# EAGLE board Teensy_3_1_XBee Adapter_Panel_v10 (EAGLE 7.2.0), part 1 of 2
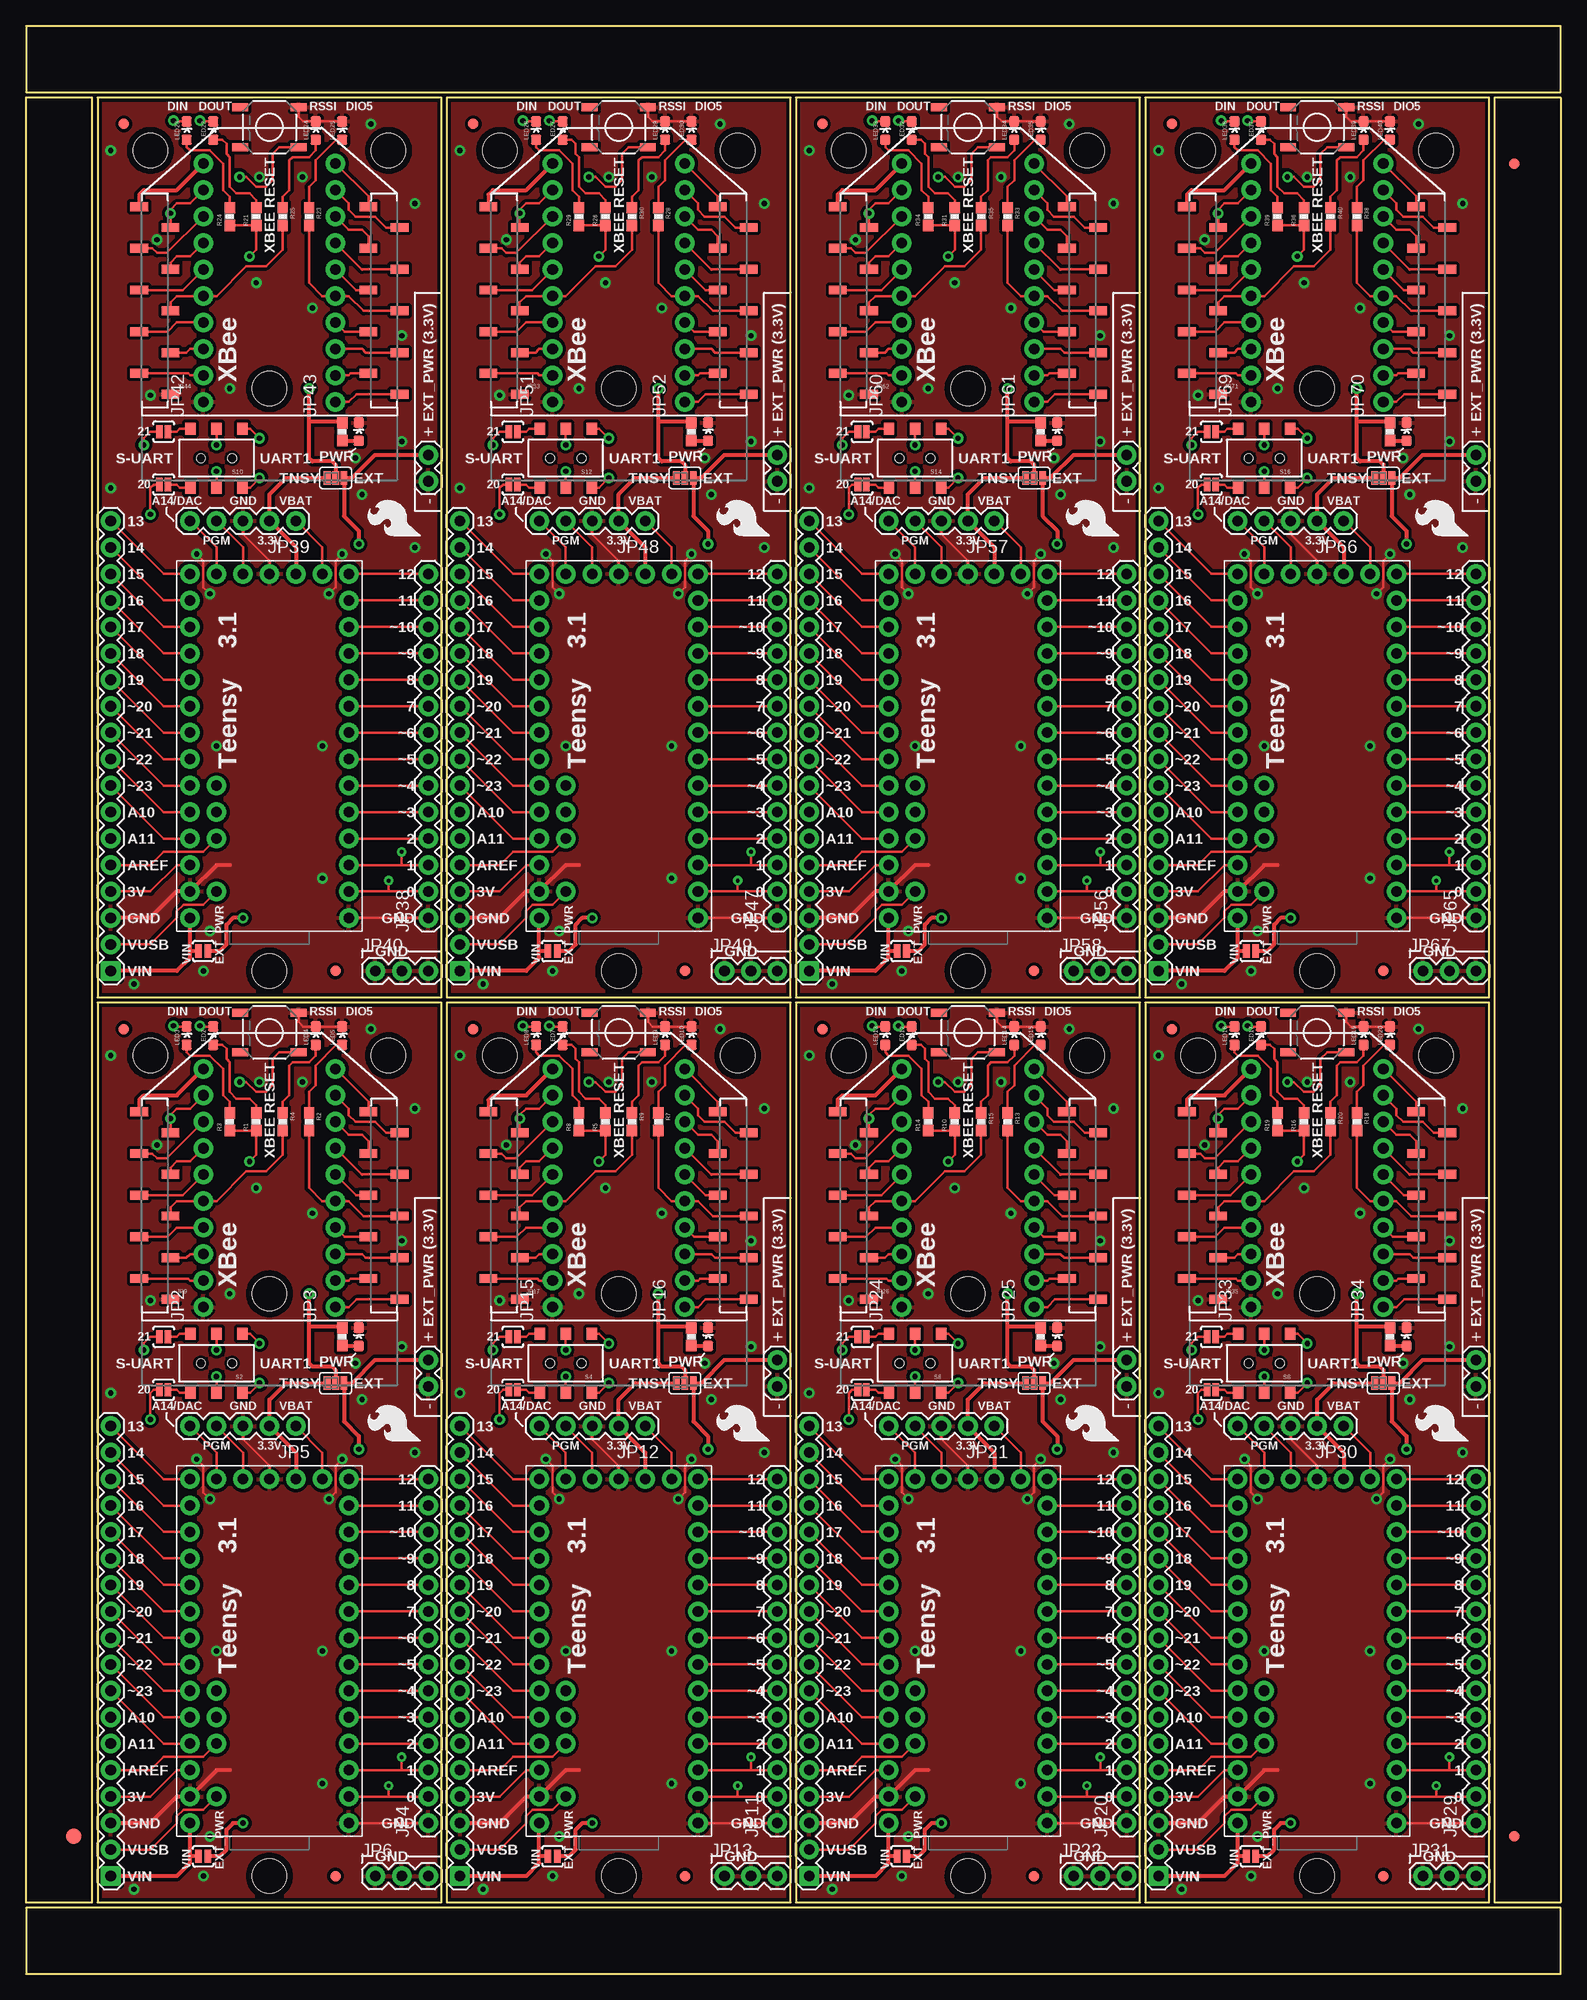
[diagram p0: board, top side]
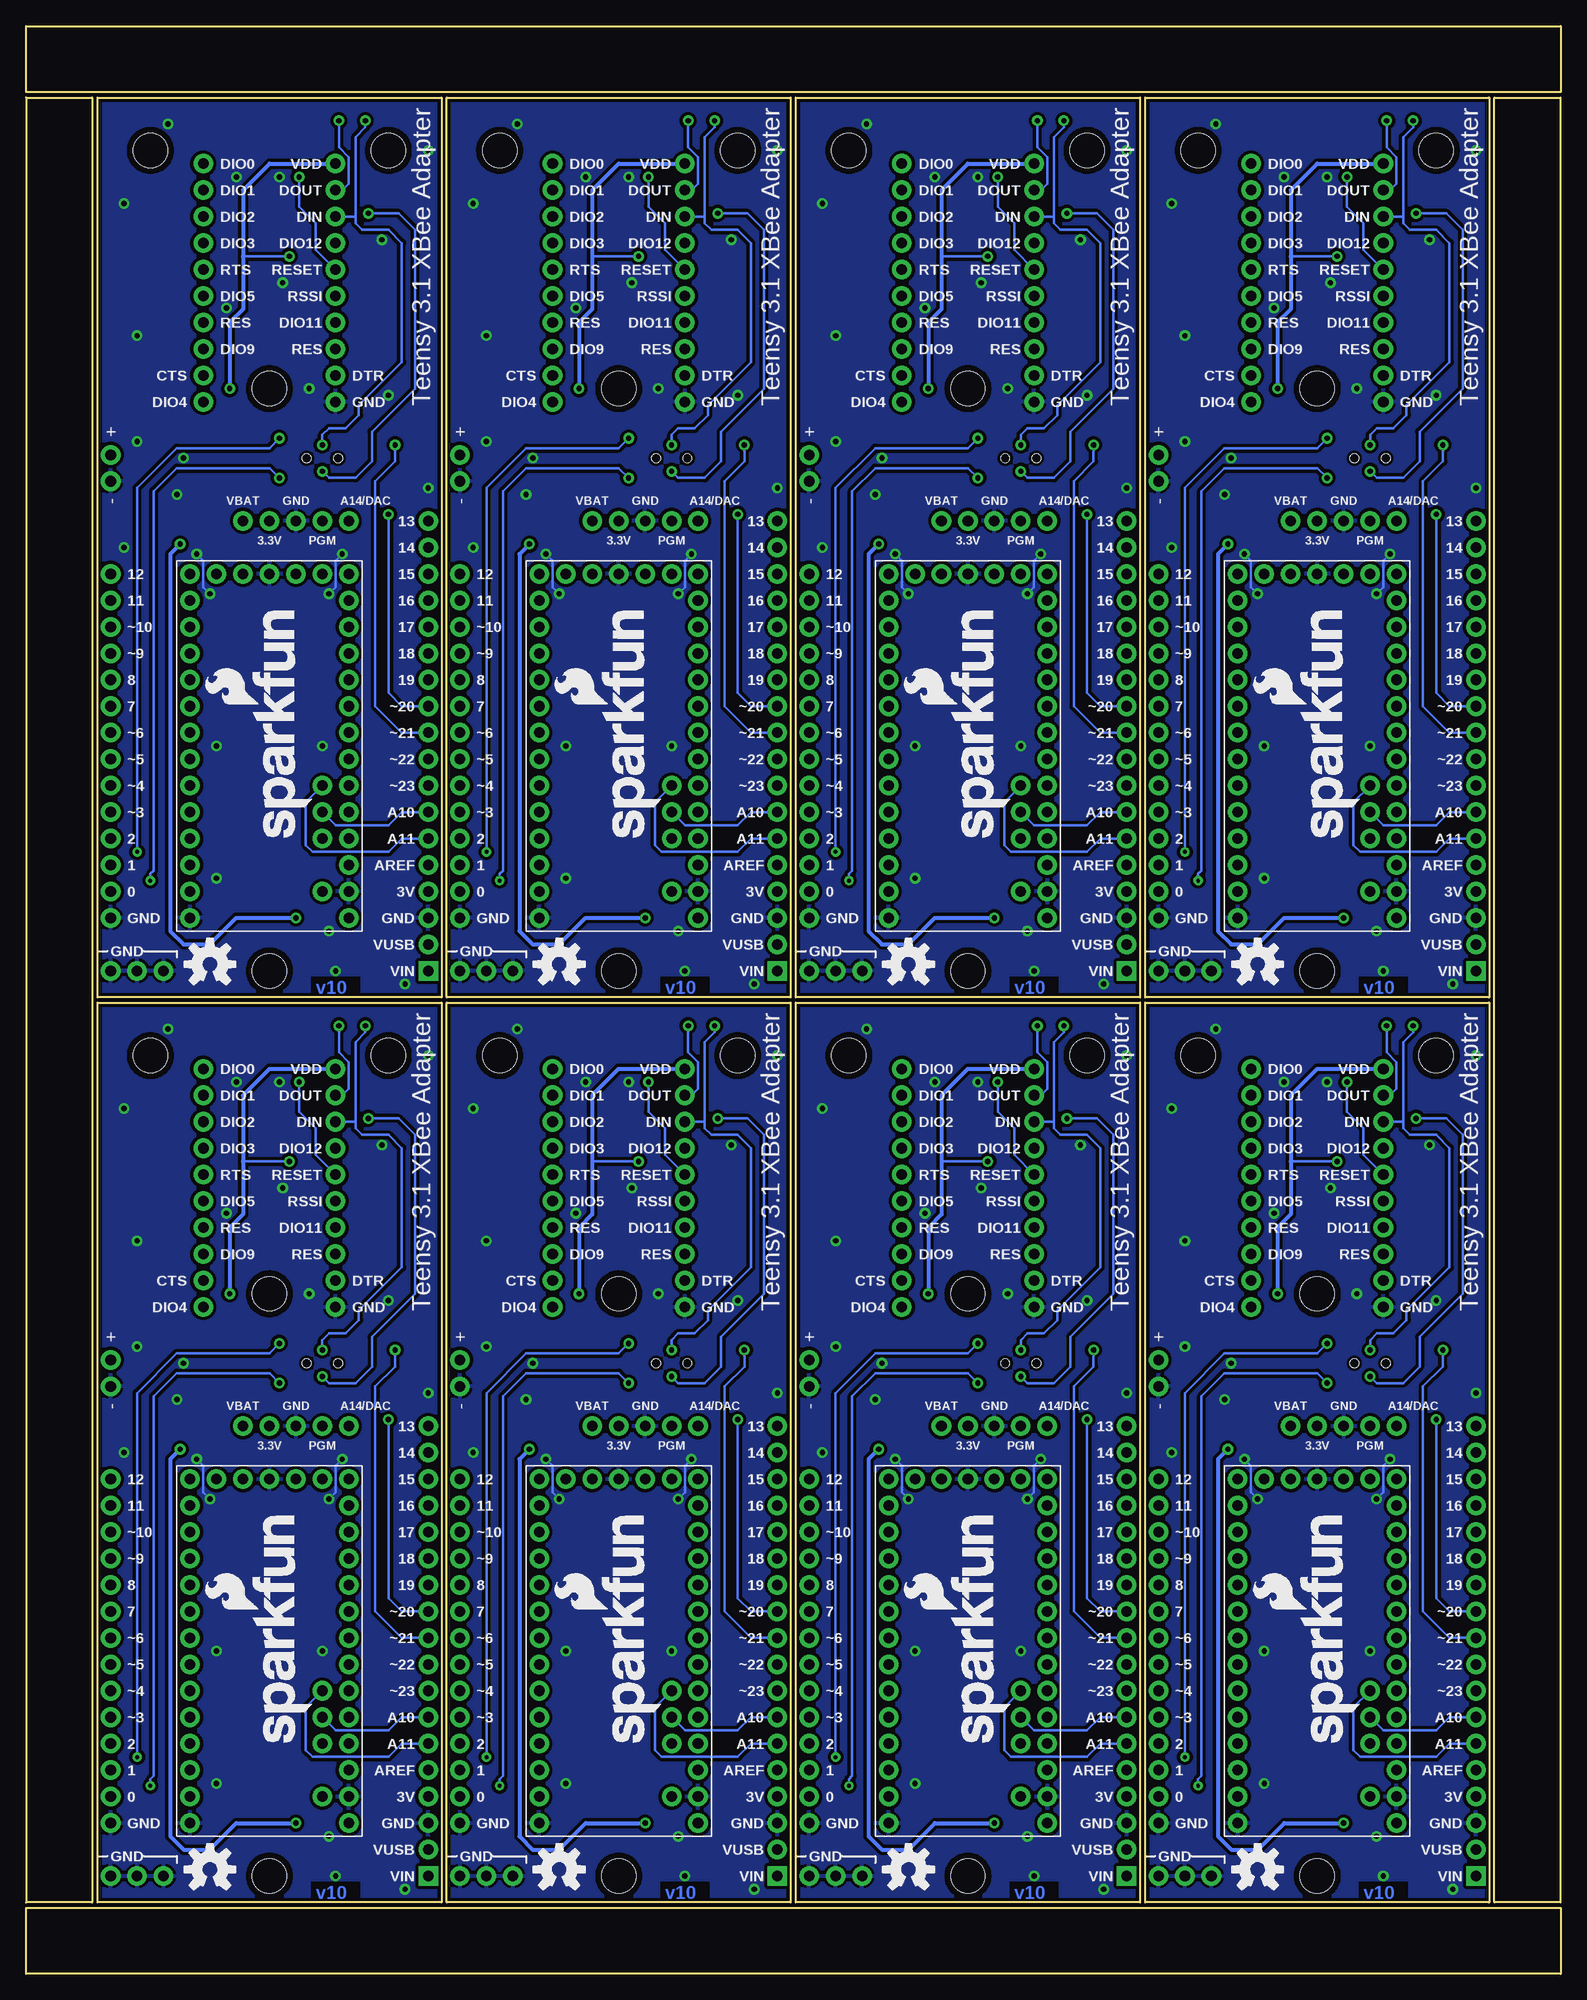
[diagram p1: board, bottom side, seen from below]

Size 147.32 x 186.94 mm. Coordinates in mm from the lower left corner, seen from the top.
Outline: 6.86,6.86 39.88,6.86 39.88,93.22 6.86,93.22 6.86,6.86
Outline: 40.39,6.86 73.41,6.86 73.41,93.22 40.39,93.22 40.39,6.86
Outline: 73.91,6.86 106.93,6.86 106.93,93.22 73.91,93.22 73.91,6.86
Outline: 107.44,6.86 140.46,6.86 140.46,93.22 107.44,93.22 107.44,6.86
Outline: 6.86,93.73 39.88,93.73 39.88,180.09 6.86,180.09 6.86,93.73
Outline: 40.39,93.73 73.41,93.73 73.41,180.09 40.39,180.09 40.39,93.73
Outline: 73.91,93.73 106.93,93.73 106.93,180.09 73.91,180.09 73.91,93.73
Outline: 107.44,93.73 140.46,93.73 140.46,180.09 107.44,180.09 107.44,93.73
Outline: 6.35,6.86 6.35,180.09 0,180.09 0,6.86 6.35,6.86
Outline: 0,0 147.32,0 147.32,6.35 0,6.35 0,0
Outline: 140.97,6.86 147.32,6.86 147.32,180.09 140.97,180.09 140.97,6.86
Outline: 147.32,186.94 0,186.94 0,180.59 147.32,180.59 147.32,186.94
Copper layers (1*16): Top 0.035mm / dielectric 1.5mm / Bottom 0.035mm
Design rules "SparkFun-2-layer": minimum track width 7mil, minimum drill 15mil, track to track 8mil, track to pad 8mil, pad to pad 8mil, via to via 8mil, smd to smd 8mil, copper to edge 8mil, drill to drill 8mil, minimum pad ring 12mil, minimum via ring 10mil, stop-mask expansion 4mil, vias tented up to drill 20mil, thermal gap 10mil
Net classes: 0 default: width 0.203 mm; 1 vcc: width 0.254 mm

## Footprints (pad centres in the part's own frame; a part is rotated, then mirrored left to right if it is on the bottom)
FIDUCIAL-1.5X3 = smd 1.5 x 1.5: 1 0,0
FIDUCIAL-1X2 = smd 1 x 1: 1 0,0
TEENSY-3.1_NOSILK = drill 1.016 pad 1.88: 0 16.51,3.81; 1 16.51,6.35; 2 16.51,8.89; 3 16.51,11.43; 3.3V 11.43,34.29; 3V 1.27,6.35; 4 16.51,13.97; 5 16.51,16.51; 6 16.51,19.05; 7 16.51,21.59; 8 16.51,24.13; 9 16.51,26.67; 10 16.51,29.21; 11 16.51,31.75; 12 16.51,34.29; 13 1.27,34.29; 14 1.27,31.75; 15 1.27,29.21; 16 1.27,26.67; 17 1.27,24.13; 18 1.27,21.59; 19 1.27,19.05; 20 1.27,16.51; 21 1.27,13.97; 22 1.27,11.43; 23 1.27,8.89; A10 3.81,11.43; A11 3.81,13.97; A14/DAC 3.81,34.29; AGND 1.27,3.81; AREF 3.81,8.89; GND 8.89,34.29; GND1 16.51,1.27; PROG 6.35,34.29; VBAT 13.97,34.29; VIN 1.27,1.27; VUSB 3.81,3.81
1X10_NO_SILK = drill 1.016 pad 1.88: 1 0,0; 2 2.54,0; 3 5.08,0; 4 7.62,0; 5 10.16,0; 6 12.7,0; 7 15.24,0; 8 17.78,0; 9 20.32,0; 10 22.86,0
1X14 = drill 1.016 pad 1.88: 1 0,0; 2 2.54,0; 3 5.08,0; 4 7.62,0; 5 10.16,0; 6 12.7,0; 7 15.24,0; 8 17.78,0; 9 20.32,0; 10 22.86,0; 11 25.4,0; 12 27.94,0; 13 30.48,0; 14 33.02,0
1X05 = drill 1.016 pad 1.88: 1 0,0; 2 2.54,0; 3 5.08,0; 4 7.62,0; 5 10.16,0
1X03 = drill 1.016 pad 1.88: 1 0,0; 2 2.54,0; 3 5.08,0
1X18 = drill 1.016 pad 1.88 square: 1 0,0 | drill 1.016 pad 1.88: 2 2.54,0; 3 5.08,0; 4 7.62,0; 5 10.16,0; 6 12.7,0; 7 15.24,0; 8 17.78,0; 9 20.32,0; 10 22.86,0; 11 25.4,0; 12 27.94,0; 13 30.48,0; 14 33.02,0; 15 35.56,0; 16 38.1,0; 17 40.64,0; 18 43.18,0
1X02 = drill 1.016 pad 1.88: 1 0,0; 2 2.54,0
XBEE-SMD = smd 1.7 x 0.85: 1 -12.5,20; 2 -9.5,18; 3 -12.5,16; 4 -9.5,14; 5 -12.5,12; 6 -9.5,10; 7 -12.5,8; 8 -9.5,6; 9 -12.5,4; 10 -9.5,2; 11 12.5,2; 12 9.5,4; 13 12.5,6; 14 9.5,8; 15 12.5,10; 16 9.5,12; 17 12.5,14; 18 9.5,16; 19 12.5,18; 20 9.5,20
LED-0603 = smd 1 x 1: A 0,-0.877; C 0,0.877
0603-RES = smd 1.1 x 1: 1 -0.85,0; 2 0.85,0
TACTILE-SWITCH-SMD = smd 1.524 x 0.762: 1 -2.794,1.905; 2 2.794,1.905; 3 -2.794,-1.905; 4 2.794,-1.905
AYZ0202 = smd 1 x 1.15: 1 -2.5,2.825; 2 0,2.825; 3 2.5,2.825; 4 -2.5,-2.825; 5 0,-2.825; 6 2.5,-2.825 | hole 0.85: 1.5,0; -1.5,0
PAD-JUMPER-2-NC_BY_PASTE_YES_SILK = smd 0.635 x 1.27: 1 -0.401,0; 2 0.413,0
PAD-JUMPER-3-2OF3_NC_BY_PASTE_YES_SILK_FULL_BOX = smd 0.635 x 1.27: 1 -0.813,0; 2 0,0; 3 0.813,0
PAD-JUMPER-2-NO_YES_SILK = smd 0.635 x 1.27: 1 -0.45,0; 2 0.45,0
STAND-OFF = hole 3.302: 0,0

## Placement (x,y rotation side)
E$1  [FIDUCIAL-1.5X3]  4.57,13.21 0 top
E$4  [FIDUCIAL-1X2]  142.88,13.21 0 top
E$5  [FIDUCIAL-1X2]  142.88,173.74 180 top
FID1  FIDUCIAL1X2  [FIDUCIAL-1X2]  29.72,9.4 0 top
FID2  FIDUCIAL1X2  [FIDUCIAL-1X2]  9.4,90.68 0 top
FID3  FIDUCIAL1X2  [FIDUCIAL-1X2]  63.25,9.4 0 top
FID4  FIDUCIAL1X2  [FIDUCIAL-1X2]  42.93,90.68 0 top
FID5  FIDUCIAL1X2  [FIDUCIAL-1X2]  96.77,9.4 0 top
FID6  FIDUCIAL1X2  [FIDUCIAL-1X2]  76.45,90.68 0 top
FID7  FIDUCIAL1X2  [FIDUCIAL-1X2]  130.3,9.4 0 top
FID8  FIDUCIAL1X2  [FIDUCIAL-1X2]  109.98,90.68 0 top
FID9  FIDUCIAL1X2  [FIDUCIAL-1X2]  29.72,96.27 0 top
FID10  FIDUCIAL1X2  [FIDUCIAL-1X2]  9.4,177.55 0 top
FID11  FIDUCIAL1X2  [FIDUCIAL-1X2]  63.25,96.27 0 top
FID12  FIDUCIAL1X2  [FIDUCIAL-1X2]  42.93,177.55 0 top
FID13  FIDUCIAL1X2  [FIDUCIAL-1X2]  96.77,96.27 0 top
FID14  FIDUCIAL1X2  [FIDUCIAL-1X2]  76.45,177.55 0 top
FID15  FIDUCIAL1X2  [FIDUCIAL-1X2]  130.3,96.27 0 top
FID16  FIDUCIAL1X2  [FIDUCIAL-1X2]  109.98,177.55 0 top
JP1  TEENSY-3.1NOSILK  [TEENSY-3.1_NOSILK]  14.48,13.21 0 top
JP2  [1X10_NO_SILK]  17.02,64.01 90 top
JP3  [1X10_NO_SILK]  29.72,64.01 90 top
JP4  DNP  [1X14]  38.61,14.48 90 top
JP5  DNP  [1X05]  25.91,52.58 180 top
JP6  DNP  [1X03]  33.53,9.4 0 top
JP7  DNP\  [1X18]  8.13,9.4 90 top
JP8  DNP  [1X02]  38.61,58.93 270 top
JP9  CONN-09042  [XBEE-SMD]  23.37,62.74 0 top
JP10  TEENSY-3.1NOSILK  [TEENSY-3.1_NOSILK]  48.01,13.21 0 top
JP11  DNP  [1X14]  72.14,14.48 90 top
JP12  DNP  [1X05]  59.44,52.58 180 top
JP13  DNP  [1X03]  67.06,9.4 0 top
JP14  DNP\  [1X18]  41.66,9.4 90 top
JP15  [1X10_NO_SILK]  50.55,64.01 90 top
JP16  [1X10_NO_SILK]  63.25,64.01 90 top
JP17  CONN-09042  [XBEE-SMD]  56.9,62.74 0 top
JP18  DNP  [1X02]  72.14,58.93 270 top
JP19  TEENSY-3.1NOSILK  [TEENSY-3.1_NOSILK]  81.53,13.21 0 top
JP20  DNP  [1X14]  105.66,14.48 90 top
JP21  DNP  [1X05]  92.96,52.58 180 top
JP22  DNP  [1X03]  100.58,9.4 0 top
JP23  DNP\  [1X18]  75.18,9.4 90 top
JP24  [1X10_NO_SILK]  84.07,64.01 90 top
JP25  [1X10_NO_SILK]  96.77,64.01 90 top
JP26  CONN-09042  [XBEE-SMD]  90.42,62.74 0 top
JP27  DNP  [1X02]  105.66,58.93 270 top
JP28  TEENSY-3.1NOSILK  [TEENSY-3.1_NOSILK]  115.06,13.21 0 top
JP29  DNP  [1X14]  139.19,14.48 90 top
JP30  DNP  [1X05]  126.49,52.58 180 top
JP31  DNP  [1X03]  134.11,9.4 0 top
JP32  DNP\  [1X18]  108.71,9.4 90 top
JP33  [1X10_NO_SILK]  117.6,64.01 90 top
JP34  [1X10_NO_SILK]  130.3,64.01 90 top
JP35  CONN-09042  [XBEE-SMD]  123.95,62.74 0 top
JP36  DNP  [1X02]  139.19,58.93 270 top
JP37  TEENSY-3.1NOSILK  [TEENSY-3.1_NOSILK]  14.48,100.08 0 top
JP38  DNP  [1X14]  38.61,101.35 90 top
JP39  DNP  [1X05]  25.91,139.45 180 top
JP40  DNP  [1X03]  33.53,96.27 0 top
JP41  DNP\  [1X18]  8.13,96.27 90 top
JP42  [1X10_NO_SILK]  17.02,150.88 90 top
JP43  [1X10_NO_SILK]  29.72,150.88 90 top
JP44  CONN-09042  [XBEE-SMD]  23.37,149.61 0 top
JP45  DNP  [1X02]  38.61,145.8 270 top
JP46  TEENSY-3.1NOSILK  [TEENSY-3.1_NOSILK]  48.01,100.08 0 top
JP47  DNP  [1X14]  72.14,101.35 90 top
JP48  DNP  [1X05]  59.44,139.45 180 top
JP49  DNP  [1X03]  67.06,96.27 0 top
JP50  DNP\  [1X18]  41.66,96.27 90 top
JP51  [1X10_NO_SILK]  50.55,150.88 90 top
JP52  [1X10_NO_SILK]  63.25,150.88 90 top
JP53  CONN-09042  [XBEE-SMD]  56.9,149.61 0 top
JP54  DNP  [1X02]  72.14,145.8 270 top
JP55  TEENSY-3.1NOSILK  [TEENSY-3.1_NOSILK]  81.53,100.08 0 top
JP56  DNP  [1X14]  105.66,101.35 90 top
JP57  DNP  [1X05]  92.96,139.45 180 top
JP58  DNP  [1X03]  100.58,96.27 0 top
JP59  DNP\  [1X18]  75.18,96.27 90 top
JP60  [1X10_NO_SILK]  84.07,150.88 90 top
JP61  [1X10_NO_SILK]  96.77,150.88 90 top
JP62  CONN-09042  [XBEE-SMD]  90.42,149.61 0 top
JP63  DNP  [1X02]  105.66,145.8 270 top
JP64  TEENSY-3.1NOSILK  [TEENSY-3.1_NOSILK]  115.06,100.08 0 top
JP65  DNP  [1X14]  139.19,101.35 90 top
JP66  DNP  [1X05]  126.49,139.45 180 top
JP67  DNP  [1X03]  134.11,96.27 0 top
JP68  DNP\  [1X18]  108.71,96.27 90 top
JP69  [1X10_NO_SILK]  117.6,150.88 90 top
JP70  [1X10_NO_SILK]  130.3,150.88 90 top
JP71  CONN-09042  [XBEE-SMD]  123.95,149.61 0 top
JP72  DNP  [1X02]  139.19,145.8 270 top
LED1  Red  [LED-0603]  31.94,61.15 0 top
LED2  Red  [LED-0603]  17.97,90.04 0 top
LED3  Green  [LED-0603]  15.43,90.04 0 top
LED4  Green  [LED-0603]  27.81,90.04 0 top
LED5  Green  [LED-0603]  30.35,90.04 0 top
LED6  Red  [LED-0603]  65.47,61.15 0 top
LED7  Red  [LED-0603]  51.5,90.04 0 top
LED8  Green  [LED-0603]  48.96,90.04 0 top
LED9  Green  [LED-0603]  61.34,90.04 0 top
LED10  Green  [LED-0603]  63.88,90.04 0 top
LED11  Red  [LED-0603]  99,61.15 0 top
LED12  Red  [LED-0603]  85.03,90.04 0 top
LED13  Green  [LED-0603]  82.49,90.04 0 top
LED14  Green  [LED-0603]  94.87,90.04 0 top
LED15  Green  [LED-0603]  97.41,90.04 0 top
LED16  Red  [LED-0603]  132.52,61.15 0 top
LED17  Red  [LED-0603]  118.55,90.04 0 top
LED18  Green  [LED-0603]  116.01,90.04 0 top
LED19  Green  [LED-0603]  128.4,90.04 0 top
LED20  Green  [LED-0603]  130.94,90.04 0 top
LED21  Red  [LED-0603]  31.94,148.02 0 top
LED22  Red  [LED-0603]  17.97,176.91 0 top
LED23  Green  [LED-0603]  15.43,176.91 0 top
LED24  Green  [LED-0603]  27.81,176.91 0 top
LED25  Green  [LED-0603]  30.35,176.91 0 top
LED26  Red  [LED-0603]  65.47,148.02 0 top
LED27  Red  [LED-0603]  51.5,176.91 0 top
LED28  Green  [LED-0603]  48.96,176.91 0 top
LED29  Green  [LED-0603]  61.34,176.91 0 top
LED30  Green  [LED-0603]  63.88,176.91 0 top
LED31  Red  [LED-0603]  99,148.02 0 top
LED32  Red  [LED-0603]  85.03,176.91 0 top
LED33  Green  [LED-0603]  82.49,176.91 0 top
LED34  Green  [LED-0603]  94.87,176.91 0 top
LED35  Green  [LED-0603]  97.41,176.91 0 top
LED36  Red  [LED-0603]  132.52,148.02 0 top
LED37  Red  [LED-0603]  118.55,176.91 0 top
LED38  Green  [LED-0603]  116.01,176.91 0 top
LED39  Green  [LED-0603]  128.4,176.91 0 top
LED40  Green  [LED-0603]  130.94,176.91 0 top
LOGO1  SFE_LOGO_FLAME.2_INCH  [SFE_LOGO_FLAME_.2]  38.13,50.83 90 top
LOGO2  OSHW-LOGOM  [OSHW-LOGO-M]  29.08,10.03 0 bottom
LOGO3  SFE_LOGO_NAME_FLAME.2_INCH  [SFE_LOGO_NAME_FLAME_.2]  19.24,21.46 90 bottom
LOGO4  OSHW-LOGOM  [OSHW-LOGO-M]  62.61,10.03 0 bottom
LOGO5  SFE_LOGO_NAME_FLAME.2_INCH  [SFE_LOGO_NAME_FLAME_.2]  52.77,21.46 90 bottom
LOGO6  SFE_LOGO_FLAME.2_INCH  [SFE_LOGO_FLAME_.2]  71.66,50.83 90 top
LOGO7  OSHW-LOGOM  [OSHW-LOGO-M]  96.14,10.03 0 bottom
LOGO8  SFE_LOGO_NAME_FLAME.2_INCH  [SFE_LOGO_NAME_FLAME_.2]  86.3,21.46 90 bottom
LOGO9  SFE_LOGO_FLAME.2_INCH  [SFE_LOGO_FLAME_.2]  105.19,50.83 90 top
LOGO10  OSHW-LOGOM  [OSHW-LOGO-M]  129.67,10.03 0 bottom
LOGO11  SFE_LOGO_NAME_FLAME.2_INCH  [SFE_LOGO_NAME_FLAME_.2]  119.82,21.46 90 bottom
LOGO12  SFE_LOGO_FLAME.2_INCH  [SFE_LOGO_FLAME_.2]  138.72,50.83 90 top
LOGO13  OSHW-LOGOM  [OSHW-LOGO-M]  29.08,96.9 0 bottom
LOGO14  SFE_LOGO_NAME_FLAME.2_INCH  [SFE_LOGO_NAME_FLAME_.2]  19.24,108.33 90 bottom
LOGO15  SFE_LOGO_FLAME.2_INCH  [SFE_LOGO_FLAME_.2]  38.13,137.7 90 top
LOGO16  OSHW-LOGOM  [OSHW-LOGO-M]  62.61,96.9 0 bottom
LOGO17  SFE_LOGO_NAME_FLAME.2_INCH  [SFE_LOGO_NAME_FLAME_.2]  52.77,108.33 90 bottom
LOGO18  SFE_LOGO_FLAME.2_INCH  [SFE_LOGO_FLAME_.2]  71.66,137.7 90 top
LOGO19  OSHW-LOGOM  [OSHW-LOGO-M]  96.14,96.9 0 bottom
LOGO20  SFE_LOGO_NAME_FLAME.2_INCH  [SFE_LOGO_NAME_FLAME_.2]  86.3,108.33 90 bottom
LOGO21  SFE_LOGO_FLAME.2_INCH  [SFE_LOGO_FLAME_.2]  105.19,137.7 90 top
LOGO22  OSHW-LOGOM  [OSHW-LOGO-M]  129.67,96.9 0 bottom
LOGO23  SFE_LOGO_NAME_FLAME.2_INCH  [SFE_LOGO_NAME_FLAME_.2]  119.82,108.33 90 bottom
LOGO24  SFE_LOGO_FLAME.2_INCH  [SFE_LOGO_FLAME_.2]  138.72,137.7 90 top
R1  1k  [0603-RES]  22.1,81.79 90 top
R2  1k  [0603-RES]  27.18,81.79 270 top
R3  1k  [0603-RES]  19.56,81.79 90 top
R4  1k  [0603-RES]  24.64,81.79 270 top
R5  1k  [0603-RES]  55.63,81.79 90 top
R6  1k  [0603-RES]  63.88,61.15 90 top
R7  1k  [0603-RES]  60.71,81.79 270 top
R8  1k  [0603-RES]  53.09,81.79 90 top
R9  1k  [0603-RES]  58.17,81.79 270 top
R10  1k  [0603-RES]  89.15,81.79 90 top
R11  1k  [0603-RES]  30.35,61.15 90 top
R12  1k  [0603-RES]  97.41,61.15 90 top
R13  1k  [0603-RES]  94.23,81.79 270 top
R14  1k  [0603-RES]  86.61,81.79 90 top
R15  1k  [0603-RES]  91.69,81.79 270 top
R16  1k  [0603-RES]  122.68,81.79 90 top
R17  1k  [0603-RES]  130.94,61.15 90 top
R18  1k  [0603-RES]  127.76,81.79 270 top
R19  1k  [0603-RES]  120.14,81.79 90 top
R20  1k  [0603-RES]  125.22,81.79 270 top
R21  1k  [0603-RES]  22.1,168.66 90 top
R22  1k  [0603-RES]  30.35,148.02 90 top
R23  1k  [0603-RES]  27.18,168.66 270 top
R24  1k  [0603-RES]  19.56,168.66 90 top
R25  1k  [0603-RES]  24.64,168.66 270 top
R26  1k  [0603-RES]  55.63,168.66 90 top
R27  1k  [0603-RES]  63.88,148.02 90 top
R28  1k  [0603-RES]  60.71,168.66 270 top
R29  1k  [0603-RES]  53.09,168.66 90 top
R30  1k  [0603-RES]  58.17,168.66 270 top
R31  1k  [0603-RES]  89.15,168.66 90 top
R32  1k  [0603-RES]  97.41,148.02 90 top
R33  1k  [0603-RES]  94.23,168.66 270 top
R34  1k  [0603-RES]  86.61,168.66 90 top
R35  1k  [0603-RES]  91.69,168.66 270 top
R36  1k  [0603-RES]  122.68,168.66 90 top
R37  1k  [0603-RES]  130.94,148.02 90 top
R38  1k  [0603-RES]  127.76,168.66 270 top
R39  1k  [0603-RES]  120.14,168.66 90 top
R40  1k  [0603-RES]  125.22,168.66 270 top
S1  Reset  [TACTILE-SWITCH-SMD]  56.9,90.36 180 top
S2  DPDT  [AYZ0202]  18.29,58.61 180 top
S3  Reset  [TACTILE-SWITCH-SMD]  23.37,90.36 180 top
S4  DPDT  [AYZ0202]  51.82,58.61 180 top
S5  Reset  [TACTILE-SWITCH-SMD]  90.42,90.36 180 top
S6  DPDT  [AYZ0202]  85.34,58.61 180 top
S7  Reset  [TACTILE-SWITCH-SMD]  123.95,90.36 180 top
S8  DPDT  [AYZ0202]  118.87,58.61 180 top
S9  Reset  [TACTILE-SWITCH-SMD]  23.37,177.23 180 top
S10  DPDT  [AYZ0202]  18.29,145.48 180 top
S11  Reset  [TACTILE-SWITCH-SMD]  56.9,177.23 180 top
S12  DPDT  [AYZ0202]  51.82,145.48 180 top
S13  Reset  [TACTILE-SWITCH-SMD]  90.42,177.23 180 top
S14  DPDT  [AYZ0202]  85.34,145.48 180 top
S15  Reset  [TACTILE-SWITCH-SMD]  123.95,177.23 180 top
S16  DPDT  [AYZ0202]  118.87,145.48 180 top
SJ1  D_TX  [PAD-JUMPER-2-NC_BY_PASTE_YES_SILK]  13.21,61.15 0 top
SJ2  D_TX  [PAD-JUMPER-2-NC_BY_PASTE_YES_SILK]  46.74,61.15 0 top
SJ3  D_RX  [PAD-JUMPER-2-NC_BY_PASTE_YES_SILK]  13.21,56.07 0 top
SJ4  JUMPER-PAD-3-2OF3_NC_BY_PASTE  [PAD-JUMPER-3-2OF3_NC_BY_PASTE_YES_SILK_FULL_BOX]  29.72,56.71 180 top
SJ5  EXT_JPR  [PAD-JUMPER-2-NO_YES_SILK]  17.02,11.3 0 top
SJ6  D_RX  [PAD-JUMPER-2-NC_BY_PASTE_YES_SILK]  46.74,56.07 0 top
SJ7  JUMPER-PAD-3-2OF3_NC_BY_PASTE  [PAD-JUMPER-3-2OF3_NC_BY_PASTE_YES_SILK_FULL_BOX]  63.25,56.71 180 top
SJ8  EXT_JPR  [PAD-JUMPER-2-NO_YES_SILK]  50.55,11.3 0 top
SJ9  D_TX  [PAD-JUMPER-2-NC_BY_PASTE_YES_SILK]  80.26,61.15 0 top
SJ10  D_RX  [PAD-JUMPER-2-NC_BY_PASTE_YES_SILK]  80.26,56.07 0 top
SJ11  JUMPER-PAD-3-2OF3_NC_BY_PASTE  [PAD-JUMPER-3-2OF3_NC_BY_PASTE_YES_SILK_FULL_BOX]  96.77,56.71 180 top
SJ12  EXT_JPR  [PAD-JUMPER-2-NO_YES_SILK]  84.07,11.3 0 top
SJ13  D_TX  [PAD-JUMPER-2-NC_BY_PASTE_YES_SILK]  113.79,61.15 0 top
SJ14  D_RX  [PAD-JUMPER-2-NC_BY_PASTE_YES_SILK]  113.79,56.07 0 top
SJ15  JUMPER-PAD-3-2OF3_NC_BY_PASTE  [PAD-JUMPER-3-2OF3_NC_BY_PASTE_YES_SILK_FULL_BOX]  130.3,56.71 180 top
SJ16  EXT_JPR  [PAD-JUMPER-2-NO_YES_SILK]  117.6,11.3 0 top
SJ17  D_TX  [PAD-JUMPER-2-NC_BY_PASTE_YES_SILK]  13.21,148.02 0 top
SJ18  D_RX  [PAD-JUMPER-2-NC_BY_PASTE_YES_SILK]  13.21,142.94 0 top
SJ19  JUMPER-PAD-3-2OF3_NC_BY_PASTE  [PAD-JUMPER-3-2OF3_NC_BY_PASTE_YES_SILK_FULL_BOX]  29.72,143.57 180 top
SJ20  EXT_JPR  [PAD-JUMPER-2-NO_YES_SILK]  17.02,98.17 0 top
SJ21  D_TX  [PAD-JUMPER-2-NC_BY_PASTE_YES_SILK]  46.74,148.02 0 top
SJ22  D_RX  [PAD-JUMPER-2-NC_BY_PASTE_YES_SILK]  46.74,142.94 0 top
SJ23  JUMPER-PAD-3-2OF3_NC_BY_PASTE  [PAD-JUMPER-3-2OF3_NC_BY_PASTE_YES_SILK_FULL_BOX]  63.25,143.57 180 top
SJ24  EXT_JPR  [PAD-JUMPER-2-NO_YES_SILK]  50.55,98.17 0 top
SJ25  D_TX  [PAD-JUMPER-2-NC_BY_PASTE_YES_SILK]  80.26,148.02 0 top
SJ26  D_RX  [PAD-JUMPER-2-NC_BY_PASTE_YES_SILK]  80.26,142.94 0 top
SJ27  JUMPER-PAD-3-2OF3_NC_BY_PASTE  [PAD-JUMPER-3-2OF3_NC_BY_PASTE_YES_SILK_FULL_BOX]  96.77,143.57 180 top
SJ28  EXT_JPR  [PAD-JUMPER-2-NO_YES_SILK]  84.07,98.17 0 top
SJ29  D_TX  [PAD-JUMPER-2-NC_BY_PASTE_YES_SILK]  113.79,148.02 0 top
SJ30  D_RX  [PAD-JUMPER-2-NC_BY_PASTE_YES_SILK]  113.79,142.94 0 top
SJ31  JUMPER-PAD-3-2OF3_NC_BY_PASTE  [PAD-JUMPER-3-2OF3_NC_BY_PASTE_YES_SILK_FULL_BOX]  130.3,143.57 180 top
SJ32  EXT_JPR  [PAD-JUMPER-2-NO_YES_SILK]  117.6,98.17 0 top
STANDOFF1  STAND-OFF  [STAND-OFF]  34.8,88.14 0 top
STANDOFF2  STAND-OFF  [STAND-OFF]  11.94,88.14 0 top
STANDOFF3  STAND-OFF  [STAND-OFF]  23.37,9.4 0 top
STANDOFF4  STAND-OFF  [STAND-OFF]  23.37,65.28 0 top
STANDOFF5  STAND-OFF  [STAND-OFF]  68.33,88.14 0 top
STANDOFF6  STAND-OFF  [STAND-OFF]  45.47,88.14 0 top
STANDOFF7  STAND-OFF  [STAND-OFF]  56.9,9.4 0 top
STANDOFF8  STAND-OFF  [STAND-OFF]  56.9,65.28 0 top
STANDOFF9  STAND-OFF  [STAND-OFF]  101.85,88.14 0 top
STANDOFF10  STAND-OFF  [STAND-OFF]  78.99,88.14 0 top
STANDOFF11  STAND-OFF  [STAND-OFF]  90.42,9.4 0 top
STANDOFF12  STAND-OFF  [STAND-OFF]  90.42,65.28 0 top
STANDOFF13  STAND-OFF  [STAND-OFF]  135.38,88.14 0 top
STANDOFF14  STAND-OFF  [STAND-OFF]  112.52,88.14 0 top
STANDOFF15  STAND-OFF  [STAND-OFF]  123.95,9.4 0 top
STANDOFF16  STAND-OFF  [STAND-OFF]  123.95,65.28 0 top
STANDOFF17  STAND-OFF  [STAND-OFF]  34.8,175.01 0 top
STANDOFF18  STAND-OFF  [STAND-OFF]  11.94,175.01 0 top
STANDOFF19  STAND-OFF  [STAND-OFF]  23.37,96.27 0 top
STANDOFF20  STAND-OFF  [STAND-OFF]  23.37,152.15 0 top
STANDOFF21  STAND-OFF  [STAND-OFF]  68.33,175.01 0 top
STANDOFF22  STAND-OFF  [STAND-OFF]  45.47,175.01 0 top
STANDOFF23  STAND-OFF  [STAND-OFF]  56.9,96.27 0 top
STANDOFF24  STAND-OFF  [STAND-OFF]  56.9,152.15 0 top
STANDOFF25  STAND-OFF  [STAND-OFF]  101.85,175.01 0 top
STANDOFF26  STAND-OFF  [STAND-OFF]  78.99,175.01 0 top
STANDOFF27  STAND-OFF  [STAND-OFF]  90.42,96.27 0 top
STANDOFF28  STAND-OFF  [STAND-OFF]  90.42,152.15 0 top
STANDOFF29  STAND-OFF  [STAND-OFF]  135.38,175.01 0 top
STANDOFF30  STAND-OFF  [STAND-OFF]  112.52,175.01 0 top
STANDOFF31  STAND-OFF  [STAND-OFF]  123.95,96.27 0 top
STANDOFF32  STAND-OFF  [STAND-OFF]  123.95,152.15 0 top

## Library data of the parts
E$1 = SparkFun-Retired
E$4 E$5 FID1-FID16 LOGO1-LOGO24 = SparkFun-Aesthetics
JP1 JP10 JP19 JP28 JP37 JP46 JP55 JP64 = Testing
JP2 JP3 JP15 JP16 JP24 JP25 JP33 JP34 JP42 JP43 JP51 JP52 JP60 JP61 JP69 JP70 = SparkFun-Connectors; PROD_ID: CONN-11563
JP4-JP8 JP11-JP14 JP18 JP20-JP23 JP27 JP29-JP32 JP36 JP38-JP41 JP45 JP47-JP50 JP54 JP56-JP59 JP63 JP65-JP68 JP72 = SparkFun-Connectors
JP9 JP17 JP26 JP35 JP44 JP53 JP62 JP71 = SparkFun-RF; PROD_ID: CONN-09042
LED1 LED2 LED6 LED7 LED11 LED12 LED16 LED17 LED21 LED22 LED26 LED27 LED31 LED32 LED36 LED37 = SparkFun-LED; PROD_ID: DIO-00819
LED3-LED5 LED8-LED10 LED13-LED15 LED18-LED20 LED23-LED25 LED28-LED30 LED33-LED35 LED38-LED40 = SparkFun-LED; PROD_ID: DIO-00821
R1-R40 = SparkFun-Resistors; PROD_ID: RES-07856
S1 S3 S5 S7 S9 S11 S13 S15 = SparkFun-Electromechanical; PROD_ID: SWCH-08247
S2 S4 S6 S8 S10 S12 S14 S16 = SparkFun-Electromechanical; PROD_ID: SWCH-08179
SJ1-SJ32 = SparkFun-Passives
STANDOFF1-STANDOFF32 = SparkFun-Electromechanical

## Nets
1: JP10.2 JP11.4
2: JP1.2 JP4.4
3: JP1.3 JP4.5
3.3V: JP1.3.3V JP5.2 SJ4.3
3.3V1: JP10.3.3V JP12.2 SJ7.3
3.3V2: JP19.3.3V JP21.2 SJ11.3
3.3V3: JP28.3.3V JP30.2 SJ15.3
3.3V4: JP37.3.3V JP39.2 SJ19.3
3.3V5: JP46.3.3V JP48.2 SJ23.3
3.3V6: JP55.3.3V JP57.2 SJ27.3
3.3V7: JP64.3.3V JP66.2 SJ31.3
3V: JP1.3V JP7.4
3V1: JP10.3V JP14.4
3V2: JP19.3V JP23.4
3V3: JP28.3V JP32.4
3V4: JP37.3V JP41.4
3V5: JP46.3V JP50.4
3V6: JP55.3V JP59.4
3V7: JP64.3V JP68.4
4: JP1.4 JP4.6
5: JP1.5 JP4.7
6: JP1.6 JP4.8
7: JP10.4 JP11.6
7/RX1: JP10.7 JP11.9
7/RX2: JP19.7 JP20.9
7/RX3: JP1.7 JP4.9
7/RX4: JP28.7 JP29.9
7/RX5: JP37.7 JP38.9
7/RX6: JP46.7 JP47.9
7/RX7: JP55.7 JP56.9
7/RX8: JP64.7 JP65.9
8: JP10.5 JP11.7
8/TX1: JP10.8 JP11.10
8/TX2: JP19.8 JP20.10
8/TX3: JP1.8 JP4.10
8/TX4: JP28.8 JP29.10
8/TX5: JP37.8 JP38.10
8/TX6: JP46.8 JP47.10
8/TX7: JP55.8 JP56.10
8/TX8: JP64.8 JP65.10
9: JP10.6 JP11.8
9/RX1: JP10.9 JP11.11
9/RX2: JP1.9 JP4.11
9/RX3: JP19.9 JP20.11
9/RX4: JP28.9 JP29.11
9/RX5: JP37.9 JP38.11
9/RX6: JP46.9 JP47.11
9/RX7: JP55.9 JP56.11
9/RX8: JP64.9 JP65.11
10: JP10.3 JP11.5
10/TX2/CS: JP1.10 JP4.12
10/TX2/CS1: JP10.10 JP11.12
10/TX2/CS2: JP19.10 JP20.12
10/TX2/CS3: JP28.10 JP29.12
10/TX2/CS4: JP37.10 JP38.12
10/TX2/CS5: JP46.10 JP47.12
10/TX2/CS6: JP55.10 JP56.12
10/TX2/CS7: JP64.10 JP65.12
11: JP19.2 JP20.4
11/DOUT: JP1.11 JP4.13
11/DOUT1: JP10.11 JP11.13
11/DOUT2: JP19.11 JP20.13
11/DOUT3: JP28.11 JP29.13
11/DOUT4: JP37.11 JP38.13
11/DOUT5: JP46.11 JP47.13
11/DOUT6: JP55.11 JP56.13
11/DOUT7: JP64.11 JP65.13
12: JP19.4 JP20.6
12/DIN: JP1.12 JP4.14
12/DIN1: JP10.12 JP11.14
12/DIN2: JP19.12 JP20.14
12/DIN3: JP28.12 JP29.14
12/DIN4: JP37.12 JP38.14
12/DIN5: JP46.12 JP47.14
12/DIN6: JP55.12 JP56.14
12/DIN7: JP64.12 JP65.14
13: JP19.5 JP20.7
13/SCK: JP1.13 JP7.18
13/SCK1: JP10.13 JP14.18
13/SCK2: JP19.13 JP23.18
13/SCK3: JP28.13 JP32.18
13/SCK4: JP37.13 JP41.18
13/SCK5: JP46.13 JP50.18
13/SCK6: JP55.13 JP59.18
13/SCK7: JP64.13 JP68.18
14: JP19.6 JP20.8
15: JP19.3 JP20.5
16: JP28.2 JP29.4
17: JP28.4 JP29.6
18: JP28.5 JP29.7
19: JP28.6 JP29.8
20: JP28.3 JP29.5
21: JP37.2 JP38.4
22: JP37.4 JP38.6
23: JP37.5 JP38.7
24: JP37.6 JP38.8
25: JP37.3 JP38.5
26: JP46.2 JP47.4
27: JP46.4 JP47.6
28: JP46.5 JP47.7
29: JP46.6 JP47.8
30: JP46.3 JP47.5
31: JP55.2 JP56.4
32: JP55.4 JP56.6
33: JP55.5 JP56.7
34: JP55.6 JP56.8
35: JP55.3 JP56.5
36: JP64.2 JP65.4
37: JP64.4 JP65.6
38: JP64.5 JP65.7
39: JP64.6 JP65.8
40: JP64.3 JP65.5
A0/1: JP10.14 JP14.17
A0/2: JP19.14 JP23.17
A0/3: JP28.14 JP32.17
A0/4: JP37.14 JP41.17
A0/5: JP46.14 JP50.17
A0/6: JP55.14 JP59.17
A0/7: JP64.14 JP68.17
A0/14: JP1.14 JP7.17
A1: JP10.A10 JP14.7
A1/1: JP10.15 JP14.16
A1/2: JP19.15 JP23.16
A1/3: JP28.15 JP32.16
A1/4: JP37.15 JP41.16
A1/5: JP46.15 JP50.16
A1/6: JP55.15 JP59.16
A1/7: JP64.15 JP68.16
A1/15: JP1.15 JP7.16
A2: JP10.A11 JP14.6
A2/1: JP10.16 JP14.15
A2/2: JP19.16 JP23.15
A2/3: JP28.16 JP32.15
A2/4: JP37.16 JP41.15
A2/5: JP46.16 JP50.15
A2/6: JP55.16 JP59.15
A2/7: JP64.16 JP68.15
A2/16: JP1.16 JP7.15
A3: JP19.A10 JP23.7
A3/1: JP10.17 JP14.14
A3/2: JP19.17 JP23.14
A3/3: JP28.17 JP32.14
A3/4: JP37.17 JP41.14
A3/5: JP46.17 JP50.14
A3/6: JP55.17 JP59.14
A3/7: JP64.17 JP68.14
A3/17: JP1.17 JP7.14
A4: JP19.A11 JP23.6
A4/18/SDA0: JP1.18 JP7.13
A4/18/SDA1: JP10.18 JP14.13
A4/18/SDA2: JP19.18 JP23.13
A4/18/SDA3: JP28.18 JP32.13
A4/18/SDA4: JP37.18 JP41.13
A4/18/SDA5: JP46.18 JP50.13
A4/18/SDA6: JP55.18 JP59.13
A4/18/SDA7: JP64.18 JP68.13
A5: JP28.A10 JP32.7
A5/19/SCL0: JP1.19 JP7.12
A5/19/SCL1: JP10.19 JP14.12
A5/19/SCL2: JP19.19 JP23.12
A5/19/SCL3: JP28.19 JP32.12
A5/19/SCL4: JP37.19 JP41.12
A5/19/SCL5: JP46.19 JP50.12
A5/19/SCL6: JP55.19 JP59.12
A5/19/SCL7: JP64.19 JP68.12
A6: JP28.A11 JP32.6
A6/1: JP10.20 JP14.11 SJ6.1
A6/2: JP19.20 JP23.11 SJ10.1
A6/3: JP28.20 JP32.11 SJ14.1
A6/4: JP37.20 JP41.11 SJ18.1
A6/5: JP46.20 JP50.11 SJ22.1
A6/6: JP55.20 JP59.11 SJ26.1
A6/7: JP64.20 JP68.11 SJ30.1
A6/20: JP1.20 JP7.11 SJ3.1
A7: JP37.A10 JP41.7
A7/1: JP10.21 JP14.10 SJ2.1
A7/2: JP19.21 JP23.10 SJ9.1
A7/3: JP28.21 JP32.10 SJ13.1
A7/4: JP37.21 JP41.10 SJ17.1
A7/5: JP46.21 JP50.10 SJ21.1
A7/6: JP55.21 JP59.10 SJ25.1
A7/7: JP64.21 JP68.10 SJ29.1
A7/21: JP1.21 JP7.10 SJ1.1
A8: JP37.A11 JP41.6
A8/1: JP10.22 JP14.9
A8/2: JP19.22 JP23.9
A8/3: JP28.22 JP32.9
A8/4: JP37.22 JP41.9
A8/5: JP46.22 JP50.9
A8/6: JP55.22 JP59.9
A8/7: JP64.22 JP68.9
A8/22: JP1.22 JP7.9
A9: JP46.A10 JP50.7
A9/1: JP10.23 JP14.8
A9/2: JP19.23 JP23.8
A9/3: JP28.23 JP32.8
A9/4: JP37.23 JP41.8
A9/5: JP46.23 JP50.8
A9/6: JP55.23 JP59.8
A9/7: JP64.23 JP68.8
A9/23: JP1.23 JP7.8
A10: JP1.A10 JP7.7
A11: JP1.A11 JP7.6
A12: JP46.A11 JP50.6
A13: JP55.A10 JP59.7
A14: JP55.A11 JP59.6
A14/DAC: JP1.A14/DAC JP5.5
A14/DAC1: JP10.A14/DAC JP12.5
A14/DAC2: JP19.A14/DAC JP21.5
A14/DAC3: JP28.A14/DAC JP30.5
A14/DAC4: JP37.A14/DAC JP39.5
A14/DAC5: JP46.A14/DAC JP48.5
A14/DAC6: JP55.A14/DAC JP57.5
A14/DAC7: JP64.A14/DAC JP66.5
A15: JP64.A10 JP68.7
A16: JP64.A11 JP68.6
AREF: JP1.AREF JP7.5
AREF1: JP10.AREF JP14.5
AREF2: JP19.AREF JP23.5
AREF3: JP28.AREF JP32.5
AREF4: JP37.AREF JP41.5
AREF5: JP46.AREF JP50.5
AREF6: JP55.AREF JP59.5
AREF7: JP64.AREF JP68.5
CTS: JP3.2 JP9.12
CTS1: JP16.2 JP17.12
CTS2: JP25.2 JP26.12
CTS3: JP34.2 JP35.12
CTS4: JP43.2 JP44.12
CTS5: JP52.2 JP53.12
CTS6: JP61.2 JP62.12
CTS7: JP70.2 JP71.12
DIO0: JP3.10 JP9.20
DIO1: JP3.9 JP9.19
DIO2: JP3.8 JP9.18
DIO3: JP3.7 JP9.17
DIO4: JP3.1 JP9.11
DIO5: JP3.5 JP9.15 R2.2
DIO6: JP16.1 JP17.11
DIO7: JP16.3 JP17.13
DIO8: JP16.7 JP17.17
DIO9: JP3.3 JP9.13
DIO10: JP16.8 JP17.18
DIO11: JP2.4 JP9.7
DIO12: JP2.7 JP9.4
DIO13: JP16.9 JP17.19
DIO14: JP16.10 JP17.20
DIO15: JP15.4 JP17.7
DIO16: JP15.7 JP17.4
DIO17: JP16.5 JP17.15 R7.2
DIO18: JP25.1 JP26.11
DIO19: JP25.3 JP26.13
DIO20: JP25.7 JP26.17
DIO21: JP25.8 JP26.18
DIO22: JP25.9 JP26.19
DIO23: JP25.10 JP26.20
DIO24: JP24.4 JP26.7
DIO25: JP24.7 JP26.4
DIO26: JP25.5 JP26.15 R13.2
DIO27: JP34.1 JP35.11
DIO28: JP34.3 JP35.13
DIO29: JP34.7 JP35.17
DIO30: JP34.8 JP35.18
DIO31: JP34.9 JP35.19
DIO32: JP34.10 JP35.20
DIO33: JP33.4 JP35.7
DIO34: JP33.7 JP35.4
DIO35: JP34.5 JP35.15 R18.2
DIO36: JP43.1 JP44.11
DIO37: JP43.3 JP44.13
DIO38: JP43.7 JP44.17
DIO39: JP43.8 JP44.18
DIO40: JP43.9 JP44.19
DIO41: JP43.10 JP44.20
DIO42: JP42.4 JP44.7
DIO43: JP42.7 JP44.4
DIO44: JP43.5 JP44.15 R23.2
DIO45: JP52.1 JP53.11
DIO46: JP52.3 JP53.13
DIO47: JP52.7 JP53.17
DIO48: JP52.8 JP53.18
DIO49: JP52.9 JP53.19
DIO50: JP52.10 JP53.20
DIO51: JP51.4 JP53.7
DIO52: JP51.7 JP53.4
DIO53: JP52.5 JP53.15 R28.2
DIO54: JP61.1 JP62.11
DIO55: JP61.3 JP62.13
DIO56: JP61.7 JP62.17
DIO57: JP61.8 JP62.18
DIO58: JP61.9 JP62.19
DIO59: JP61.10 JP62.20
DIO60: JP60.4 JP62.7
DIO61: JP60.7 JP62.4
DIO62: JP61.5 JP62.15 R33.2
DIO63: JP70.1 JP71.11
DIO64: JP70.3 JP71.13
DIO65: JP70.7 JP71.17
DIO66: JP70.8 JP71.18
DIO67: JP70.9 JP71.19
DIO68: JP70.10 JP71.20
DIO69: JP69.4 JP71.7
DIO70: JP69.7 JP71.4
DIO71: JP70.5 JP71.15 R38.2
DTR: JP2.2 JP9.9
DTR1: JP15.2 JP17.9
DTR2: JP24.2 JP26.9
DTR3: JP33.2 JP35.9
DTR4: JP42.2 JP44.9
DTR5: JP51.2 JP53.9
DTR6: JP60.2 JP62.9
DTR7: JP69.2 JP71.9
EXT_3.3V [vcc]: JP8.1 SJ4.1 SJ5.2
EXT_3.3V1 [vcc]: JP18.1 SJ7.1 SJ8.2
EXT_3.3V2 [vcc]: JP27.1 SJ11.1 SJ12.2
EXT_3.3V3 [vcc]: JP36.1 SJ15.1 SJ16.2
EXT_3.3V4 [vcc]: JP45.1 SJ19.1 SJ20.2
EXT_3.3V5 [vcc]: JP54.1 SJ23.1 SJ24.2
EXT_3.3V6 [vcc]: JP63.1 SJ27.1 SJ28.2
EXT_3.3V7 [vcc]: JP72.1 SJ31.1 SJ32.2
GND: JP1.AGND JP1.GND JP1.GND1 JP2.1 JP4.1 JP5.3 JP6.1 JP6.2 JP6.3 JP7.3 JP8.2 JP9.10 LED1.C LED4.C LED5.C S3.3
GND1: JP10.AGND JP10.GND JP10.GND1 JP11.1 JP12.3 JP13.1 JP13.2 JP13.3 JP14.3 JP15.1 JP17.10 JP18.2 LED6.C LED9.C LED10.C S1.3
GND2: JP19.AGND JP19.GND JP19.GND1 JP20.1 JP21.3 JP22.1 JP22.2 JP22.3 JP23.3 JP24.1 JP26.10 JP27.2 LED11.C LED14.C LED15.C S5.3
GND3: JP28.AGND JP28.GND JP28.GND1 JP29.1 JP30.3 JP31.1 JP31.2 JP31.3 JP32.3 JP33.1 JP35.10 JP36.2 LED16.C LED19.C LED20.C S7.3
GND4: JP37.AGND JP37.GND JP37.GND1 JP38.1 JP39.3 JP40.1 JP40.2 JP40.3 JP41.3 JP42.1 JP44.10 JP45.2 LED21.C LED24.C LED25.C S9.3
GND5: JP46.AGND JP46.GND JP46.GND1 JP47.1 JP48.3 JP49.1 JP49.2 JP49.3 JP50.3 JP51.1 JP53.10 JP54.2 LED26.C LED29.C LED30.C S11.3
GND6: JP55.AGND JP55.GND JP55.GND1 JP56.1 JP57.3 JP58.1 JP58.2 JP58.3 JP59.3 JP60.1 JP62.10 JP63.2 LED31.C LED34.C LED35.C S13.3
GND7: JP64.AGND JP64.GND JP64.GND1 JP65.1 JP66.3 JP67.1 JP67.2 JP67.3 JP68.3 JP69.1 JP71.10 JP72.2 LED36.C LED39.C LED40.C S15.3
IN: JP2.8 JP9.3 LED3.C S2.5
IN1: JP15.8 JP17.3 LED8.C S4.5
IN2: JP24.8 JP26.3 LED13.C S6.5
IN3: JP33.8 JP35.3 LED18.C S8.5
IN4: JP42.8 JP44.3 LED23.C S10.5
IN5: JP51.8 JP53.3 LED28.C S12.5
IN6: JP60.8 JP62.3 LED33.C S14.5
IN7: JP69.8 JP71.3 LED38.C S16.5
N$1: S4.6 SJ2.2
N$2: S4.3 SJ6.2
N$3: LED6.A R6.1
N$4: LED7.A R5.2
N$5: LED8.A R8.2
N$6: LED9.A R9.1
N$7: LED10.A R7.1
N$8: S6.6 SJ9.2
N$9: S6.3 SJ10.2
N$10: LED11.A R12.1
N$11: LED12.A R10.2
N$12: LED1.A R11.1
N$13: LED13.A R14.2
N$14: LED14.A R15.1
N$15: LED15.A R13.1
N$16: S8.6 SJ13.2
N$17: LED2.A R1.2
N$18: S8.3 SJ14.2
N$19: LED3.A R3.2
N$20: LED16.A R17.1
N$21: LED17.A R16.2
N$22: LED18.A R19.2
N$23: LED19.A R20.1
N$24: LED20.A R18.1
N$25: S10.6 SJ17.2
N$26: S10.3 SJ18.2
N$27: LED21.A R22.1
N$28: LED22.A R21.2
N$29: LED23.A R24.2
N$30: LED24.A R25.1
N$31: LED25.A R23.1
N$32: S12.6 SJ21.2
N$33: S12.3 SJ22.2
N$34: LED26.A R27.1
N$35: LED27.A R26.2
N$36: LED28.A R29.2
N$37: LED29.A R30.1
N$38: LED30.A R28.1
N$39: S14.6 SJ25.2
N$40: S14.3 SJ26.2
N$41: LED31.A R32.1
N$42: LED32.A R31.2
N$43: LED4.A R4.1
N$44: LED33.A R34.2
N$45: LED34.A R35.1
N$46: LED35.A R33.1
N$47: S16.6 SJ29.2
N$48: S16.3 SJ30.2
N$49: LED36.A R37.1
N$50: LED37.A R36.2
N$51: LED38.A R39.2
N$52: LED39.A R40.1
N$53: LED40.A R38.1
N$139: LED5.A R2.1
N$140: S2.6 SJ1.2
N$141: S2.3 SJ3.2
OUT: JP2.9 JP9.2 LED2.C S2.2
OUT1: JP15.9 JP17.2 LED7.C S4.2
OUT2: JP24.9 JP26.2 LED12.C S6.2
OUT3: JP33.9 JP35.2 LED17.C S8.2
OUT4: JP42.9 JP44.2 LED22.C S10.2
OUT5: JP51.9 JP53.2 LED27.C S12.2
OUT6: JP60.9 JP62.2 LED32.C S14.2
OUT7: JP69.9 JP71.2 LED37.C S16.2
PROG: JP1.PROG JP5.4
PROG1: JP10.PROG JP12.4
PROG2: JP19.PROG JP21.4
PROG3: JP28.PROG JP30.4
PROG4: JP37.PROG JP39.4
PROG5: JP46.PROG JP48.4
PROG6: JP55.PROG JP57.4
PROG7: JP64.PROG JP66.4
RES: JP2.3 JP9.8
RES1: JP16.4 JP17.14
RES2: JP3.4 JP9.14
RES3: JP15.3 JP17.8
RES4: JP25.4 JP26.14
RES5: JP24.3 JP26.8
RES6: JP34.4 JP35.14
RES7: JP33.3 JP35.8
RES8: JP43.4 JP44.14
RES9: JP42.3 JP44.8
RES10: JP52.4 JP53.14
RES11: JP51.3 JP53.8
RES12: JP61.4 JP62.14
RES13: JP60.3 JP62.8
RES14: JP70.4 JP71.14
RES15: JP69.3 JP71.8
RESET: JP2.6 JP9.5 S3.1
RESET1: JP15.6 JP17.5 S1.1
RESET2: JP24.6 JP26.5 S5.1
RESET3: JP33.6 JP35.5 S7.1
RESET4: JP42.6 JP44.5 S9.1
RESET5: JP51.6 JP53.5 S11.1
RESET6: JP60.6 JP62.5 S13.1
RESET7: JP69.6 JP71.5 S15.1
RSSI: JP2.5 JP9.6 R4.2
RSSI1: JP15.5 JP17.6 R9.2
RSSI2: JP24.5 JP26.6 R15.2
RSSI3: JP33.5 JP35.6 R20.2
RSSI4: JP42.5 JP44.6 R25.2
RSSI5: JP51.5 JP53.6 R30.2
RSSI6: JP60.5 JP62.6 R35.2
RSSI7: JP69.5 JP71.6 R40.2
RTS: JP3.6 JP9.16
RTS1: JP16.6 JP17.16
RTS2: JP25.6 JP26.16
RTS3: JP34.6 JP35.16
RTS4: JP43.6 JP44.16
RTS5: JP52.6 JP53.16
RTS6: JP61.6 JP62.16
RTS7: JP70.6 JP71.16
UART_RX: JP1.0 JP4.2 S2.1
UART_RX1: JP10.0 JP11.2 S4.1
UART_RX2: JP19.0 JP20.2 S6.1
UART_RX3: JP28.0 JP29.2 S8.1
UART_RX4: JP37.0 JP38.2 S10.1
UART_RX5: JP46.0 JP47.2 S12.1
UART_RX6: JP55.0 JP56.2 S14.1
UART_RX7: JP64.0 JP65.2 S16.1
UART_TX: JP1.1 JP4.3 S2.4
UART_TX1: JP10.1 JP11.3 S4.4
UART_TX2: JP19.1 JP20.3 S6.4
UART_TX3: JP28.1 JP29.3 S8.4
UART_TX4: JP37.1 JP38.3 S10.4
UART_TX5: JP46.1 JP47.3 S12.4
UART_TX6: JP55.1 JP56.3 S14.4
UART_TX7: JP64.1 JP65.3 S16.4
VBAT: JP1.VBAT JP5.1
VBAT1: JP10.VBAT JP12.1
VBAT2: JP19.VBAT JP21.1
VBAT3: JP28.VBAT JP30.1
VBAT4: JP37.VBAT JP39.1
VBAT5: JP46.VBAT JP48.1
VBAT6: JP55.VBAT JP57.1
VBAT7: JP64.VBAT JP66.1
VIN: JP1.VIN JP7.1 SJ5.1
VIN1: JP10.VIN JP14.1 SJ8.1
VIN2: JP19.VIN JP23.1 SJ12.1
VIN3: JP28.VIN JP32.1 SJ16.1
VIN4: JP37.VIN JP41.1 SJ20.1
VIN5: JP46.VIN JP50.1 SJ24.1
VIN6: JP55.VIN JP59.1 SJ28.1
VIN7: JP64.VIN JP68.1 SJ32.1
VUSB: JP1.VUSB JP7.2
VUSB1: JP10.VUSB JP14.2
VUSB2: JP19.VUSB JP23.2
VUSB3: JP28.VUSB JP32.2
VUSB4: JP37.VUSB JP41.2
VUSB5: JP46.VUSB JP50.2
VUSB6: JP55.VUSB JP59.2
VUSB7: JP64.VUSB JP68.2
XBEE_VDD: JP2.10 JP9.1 R1.1 R3.1 R11.2 SJ4.2
XBEE_VDD1: JP15.10 JP17.1 R5.1 R6.2 R8.1 SJ7.2
XBEE_VDD2: JP24.10 JP26.1 R10.1 R12.2 R14.1 SJ11.2
XBEE_VDD3: JP33.10 JP35.1 R16.1 R17.2 R19.1 SJ15.2
XBEE_VDD4: JP42.10 JP44.1 R21.1 R22.2 R24.1 SJ19.2
XBEE_VDD5: JP51.10 JP53.1 R26.1 R27.2 R29.1 SJ23.2
XBEE_VDD6: JP60.10 JP62.1 R31.1 R32.2 R34.1 SJ27.2
XBEE_VDD7: JP69.10 JP71.1 R36.1 R37.2 R39.1 SJ31.2

## Tracks (layer width: path | path; a pad name or v marks a point on that pad's centre or on a via)
1
  Top 0.254: JP10.2 JP11.4
2
  Top 0.254: JP1.2 JP4.4
3
  Top 0.254: JP1.3 JP4.5
3.3V
  Top 0.406: JP1.3.3V 25.91,50.04 JP5.2 23.37,55.12 24.96,56.71 SJ4.3
3.3V1
  Top 0.406: JP10.3.3V 59.44,50.04 JP12.2 56.9,55.12 58.48,56.71 SJ7.3
3.3V2
  Top 0.406: JP19.3.3V 92.96,50.04 JP21.2 90.42,55.12 92.01,56.71 SJ11.3
3.3V3
  Top 0.406: JP28.3.3V 126.49,50.04 JP30.2 123.95,55.12 125.54,56.71 SJ15.3
3.3V4
  Top 0.406: JP37.3.3V 25.91,136.91 JP39.2 23.37,141.99 24.96,143.57 SJ19.3
3.3V5
  Top 0.406: JP46.3.3V 59.44,136.91 JP48.2 56.9,141.99 58.48,143.57 SJ23.3
3.3V6
  Top 0.406: JP55.3.3V 92.96,136.91 JP57.2 90.42,141.99 92.01,143.57 SJ27.3
3.3V7
  Top 0.406: JP64.3.3V 126.49,136.91 JP66.2 123.95,141.99 125.54,143.57 SJ31.3
3V
  Top 0.254: JP1.3V 14.48,19.56 11.94,17.02 JP7.4
3V1
  Top 0.254: JP10.3V 48.01,19.56 45.47,17.02 JP14.4
3V2
  Top 0.254: JP19.3V 81.53,19.56 78.99,17.02 JP23.4
3V3
  Top 0.254: JP28.3V 115.06,19.56 112.52,17.02 JP32.4
3V4
  Top 0.254: JP37.3V 14.48,106.43 11.94,103.89 JP41.4
3V5
  Top 0.254: JP46.3V 48.01,106.43 45.47,103.89 JP50.4
3V6
  Top 0.254: JP55.3V 81.53,106.43 78.99,103.89 JP59.4
3V7
  Top 0.254: JP64.3V 115.06,106.43 112.52,103.89 JP68.4
4
  Top 0.254: JP1.4 JP4.6
5
  Top 0.254: JP1.5 JP4.7
6
  Top 0.254: JP1.6 JP4.8
7
  Top 0.254: JP10.4 JP11.6
7/RX1
  Top 0.254: JP10.7 JP11.9
7/RX2
  Top 0.254: JP19.7 JP20.9
7/RX3
  Top 0.254: JP1.7 JP4.9
7/RX4
  Top 0.254: JP28.7 JP29.9
7/RX5
  Top 0.254: JP37.7 JP38.9
7/RX6
  Top 0.254: JP46.7 JP47.9
7/RX7
  Top 0.254: JP55.7 JP56.9
7/RX8
  Top 0.254: JP64.7 JP65.9
8
  Top 0.254: JP10.5 JP11.7
8/TX1
  Top 0.254: JP10.8 JP11.10
8/TX2
  Top 0.254: JP19.8 JP20.10
8/TX3
  Top 0.254: JP1.8 JP4.10
8/TX4
  Top 0.254: JP28.8 JP29.10
8/TX5
  Top 0.254: JP37.8 JP38.10
8/TX6
  Top 0.254: JP46.8 JP47.10
8/TX7
  Top 0.254: JP55.8 JP56.10
8/TX8
  Top 0.254: JP64.8 JP65.10
9
  Top 0.254: JP10.6 JP11.8
9/RX1
  Top 0.254: JP10.9 JP11.11
9/RX2
  Top 0.254: JP1.9 JP4.11
9/RX3
  Top 0.254: JP19.9 JP20.11
9/RX4
  Top 0.254: JP28.9 JP29.11
9/RX5
  Top 0.254: JP37.9 JP38.11
9/RX6
  Top 0.254: JP46.9 JP47.11
9/RX7
  Top 0.254: JP55.9 JP56.11
9/RX8
  Top 0.254: JP64.9 JP65.11
10
  Top 0.254: JP10.3 JP11.5
10/TX2/CS
  Top 0.254: JP1.10 JP4.12
10/TX2/CS1
  Top 0.254: JP10.10 JP11.12
10/TX2/CS2
  Top 0.254: JP19.10 JP20.12
10/TX2/CS3
  Top 0.254: JP28.10 JP29.12
10/TX2/CS4
  Top 0.254: JP37.10 JP38.12
10/TX2/CS5
  Top 0.254: JP46.10 JP47.12
10/TX2/CS6
  Top 0.254: JP55.10 JP56.12
10/TX2/CS7
  Top 0.254: JP64.10 JP65.12
11
  Top 0.254: JP19.2 JP20.4
11/DOUT
  Top 0.254: JP1.11 JP4.13
11/DOUT1
  Top 0.254: JP10.11 JP11.13
11/DOUT2
  Top 0.254: JP19.11 JP20.13
11/DOUT3
  Top 0.254: JP28.11 JP29.13
11/DOUT4
  Top 0.254: JP37.11 JP38.13
11/DOUT5
  Top 0.254: JP46.11 JP47.13
11/DOUT6
  Top 0.254: JP55.11 JP56.13
11/DOUT7
  Top 0.254: JP64.11 JP65.13
12
  Top 0.254: JP19.4 JP20.6
12/DIN
  Top 0.254: JP1.12 JP4.14
12/DIN1
  Top 0.254: JP10.12 JP11.14
12/DIN2
  Top 0.254: JP19.12 JP20.14
12/DIN3
  Top 0.254: JP28.12 JP29.14
12/DIN4
  Top 0.254: JP37.12 JP38.14
12/DIN5
  Top 0.254: JP46.12 JP47.14
12/DIN6
  Top 0.254: JP55.12 JP56.14
12/DIN7
  Top 0.254: JP64.12 JP65.14
13
  Top 0.254: JP19.5 JP20.7
13/SCK
  Top 0.254: JP1.13 13.21,47.5 JP7.18
13/SCK1
  Top 0.254: JP10.13 46.74,47.5 JP14.18
13/SCK2
  Top 0.254: JP19.13 80.26,47.5 JP23.18
13/SCK3
  Top 0.254: JP28.13 113.79,47.5 JP32.18
13/SCK4
  Top 0.254: JP37.13 13.21,134.37 JP41.18
13/SCK5
  Top 0.254: JP46.13 46.74,134.37 JP50.18
13/SCK6
  Top 0.254: JP55.13 80.26,134.37 JP59.18
13/SCK7
  Top 0.254: JP64.13 113.79,134.37 JP68.18
14
  Top 0.254: JP19.6 JP20.8
15
  Top 0.254: JP19.3 JP20.5
16
  Top 0.254: JP28.2 JP29.4
17
  Top 0.254: JP28.4 JP29.6
18
  Top 0.254: JP28.5 JP29.7
19
  Top 0.254: JP28.6 JP29.8
20
  Top 0.254: JP28.3 JP29.5
21
  Top 0.254: JP37.2 JP38.4
22
  Top 0.254: JP37.4 JP38.6
23
  Top 0.254: JP37.5 JP38.7
24
  Top 0.254: JP37.6 JP38.8
25
  Top 0.254: JP37.3 JP38.5
26
  Top 0.254: JP46.2 JP47.4
27
  Top 0.254: JP46.4 JP47.6
28
  Top 0.254: JP46.5 JP47.7
29
  Top 0.254: JP46.6 JP47.8
30
  Top 0.254: JP46.3 JP47.5
31
  Top 0.254: JP55.2 JP56.4
32
  Top 0.254: JP55.4 JP56.6
33
  Top 0.254: JP55.5 JP56.7
34
  Top 0.254: JP55.6 JP56.8
35
  Top 0.254: JP55.3 JP56.5
36
  Top 0.254: JP64.2 JP65.4
37
  Top 0.254: JP64.4 JP65.6
38
  Top 0.254: JP64.5 JP65.7
39
  Top 0.254: JP64.6 JP65.8
40
  Top 0.254: JP64.3 JP65.5
A0/1
  Top 0.254: JP10.14 46.74,44.96 JP14.17
A0/2
  Top 0.254: JP19.14 80.26,44.96 JP23.17
A0/3
  Top 0.254: JP28.14 113.79,44.96 JP32.17
A0/4
  Top 0.254: JP37.14 13.21,131.83 JP41.17
A0/5
  Top 0.254: JP46.14 46.74,131.83 JP50.17
A0/6
  Top 0.254: JP55.14 80.26,131.83 JP59.17
A0/7
  Top 0.254: JP64.14 113.79,131.83 JP68.17
A0/14
  Top 0.254: JP1.14 13.21,44.96 JP7.17
A1
  Bottom 0.254: JP10.A10 50.55,23.37 45.47,23.37 44.2,24.64 JP14.7
A1/1
  Top 0.254: JP10.15 46.74,42.42 JP14.16
A1/2
  Top 0.254: JP19.15 80.26,42.42 JP23.16
A1/3
  Top 0.254: JP28.15 113.79,42.42 JP32.16
A1/4
  Top 0.254: JP37.15 13.21,129.29 JP41.16
A1/5
  Top 0.254: JP46.15 46.74,129.29 JP50.16
A1/6
  Top 0.254: JP55.15 80.26,129.29 JP59.16
A1/7
  Top 0.254: JP64.15 113.79,129.29 JP68.16
A1/15
  Top 0.254: JP1.15 13.21,42.42 JP7.16
A2
  Bottom 0.254: JP10.A11 53.4,25.59 53.4,21.46 52.77,20.83 45.47,20.83 44.2,22.1 JP14.6
A2/1
  Top 0.254: JP10.16 46.74,39.88 JP14.15
A2/2
  Top 0.254: JP19.16 80.26,39.88 JP23.15
A2/3
  Top 0.254: JP28.16 113.79,39.88 JP32.15
A2/4
  Top 0.254: JP37.16 13.21,126.75 JP41.15
A2/5
  Top 0.254: JP46.16 46.74,126.75 JP50.15
A2/6
  Top 0.254: JP55.16 80.26,126.75 JP59.15
A2/7
  Top 0.254: JP64.16 113.79,126.75 JP68.15
A2/16
  Top 0.254: JP1.16 13.21,39.88 JP7.15
A3
  Bottom 0.254: JP19.A10 84.07,23.37 78.99,23.37 77.72,24.64 JP23.7
A3/1
  Top 0.254: JP10.17 46.74,37.34 JP14.14
A3/2
  Top 0.254: JP19.17 80.26,37.34 JP23.14
A3/3
  Top 0.254: JP28.17 113.79,37.34 JP32.14
A3/4
  Top 0.254: JP37.17 13.21,124.21 JP41.14
A3/5
  Top 0.254: JP46.17 46.74,124.21 JP50.14
A3/6
  Top 0.254: JP55.17 80.26,124.21 JP59.14
A3/7
  Top 0.254: JP64.17 113.79,124.21 JP68.14
A3/17
  Top 0.254: JP1.17 13.21,37.34 JP7.14
A4
  Bottom 0.254: JP19.A11 86.93,25.59 86.93,21.46 86.3,20.83 78.99,20.83 77.72,22.1 JP23.6
A4/18/SDA0
  Top 0.254: JP1.18 13.21,34.8 JP7.13
A4/18/SDA1
  Top 0.254: JP10.18 46.74,34.8 JP14.13
A4/18/SDA2
  Top 0.254: JP19.18 80.26,34.8 JP23.13
A4/18/SDA3
  Top 0.254: JP28.18 113.79,34.8 JP32.13
A4/18/SDA4
  Top 0.254: JP37.18 13.21,121.67 JP41.13
A4/18/SDA5
  Top 0.254: JP46.18 46.74,121.67 JP50.13
A4/18/SDA6
  Top 0.254: JP55.18 80.26,121.67 JP59.13
A4/18/SDA7
  Top 0.254: JP64.18 113.79,121.67 JP68.13
A5
  Bottom 0.254: JP28.A10 117.6,23.37 112.52,23.37 111.25,24.64 JP32.7
A5/19/SCL0
  Top 0.254: JP1.19 13.21,32.26 JP7.12
A5/19/SCL1
  Top 0.254: JP10.19 46.74,32.26 JP14.12
A5/19/SCL2
  Top 0.254: JP19.19 80.26,32.26 JP23.12
A5/19/SCL3
  Top 0.254: JP28.19 113.79,32.26 JP32.12
A5/19/SCL4
  Top 0.254: JP37.19 13.21,119.13 JP41.12
A5/19/SCL5
  Top 0.254: JP46.19 46.74,119.13 JP50.12
A5/19/SCL6
  Top 0.254: JP55.19 80.26,119.13 JP59.12
A5/19/SCL7
  Top 0.254: JP64.19 113.79,119.13 JP68.12
A6
  Bottom 0.254: JP28.A11 120.46,25.59 120.46,21.46 119.83,20.83 112.52,20.83 111.25,22.1 JP32.6
A6/1  (via drill 0.51)
  Top 0.254: JP10.20 46.74,29.72 JP14.11 | SJ6.1 45.78,56.07 45.47,55.75 v45.47,53.21
  Bottom 0.254: v45.47,53.21 45.47,36.07 44.2,34.8 JP14.11
A6/2  (via drill 0.51)
  Top 0.254: JP19.20 80.26,29.72 JP23.11 | SJ10.1 79.31,56.07 78.99,55.75 v78.99,53.21
  Bottom 0.254: v78.99,53.21 78.99,36.07 77.72,34.8 JP23.11
A6/3  (via drill 0.51)
  Top 0.254: JP28.20 113.79,29.72 JP32.11 | SJ14.1 112.84,56.07 112.52,55.75 v112.52,53.21
  Bottom 0.254: v112.52,53.21 112.52,36.07 111.25,34.8 JP32.11
A6/4  (via drill 0.51)
  Top 0.254: JP37.20 13.21,116.59 JP41.11 | SJ18.1 12.26,142.94 11.94,142.62 v11.94,140.08
  Bottom 0.254: v11.94,140.08 11.94,122.94 10.67,121.67 JP41.11
A6/5  (via drill 0.51)
  Top 0.254: JP46.20 46.74,116.59 JP50.11 | SJ22.1 45.78,142.94 45.47,142.62 v45.47,140.08
  Bottom 0.254: v45.47,140.08 45.47,122.94 44.2,121.67 JP50.11
A6/6  (via drill 0.51)
  Top 0.254: JP55.20 80.26,116.59 JP59.11 | SJ26.1 79.31,142.94 78.99,142.62 v78.99,140.08
  Bottom 0.254: v78.99,140.08 78.99,122.94 77.72,121.67 JP59.11
A6/7  (via drill 0.51)
  Top 0.254: JP64.20 113.79,116.59 JP68.11 | SJ30.1 112.84,142.94 112.52,142.62 v112.52,140.08
  Bottom 0.254: v112.52,140.08 112.52,122.94 111.25,121.67 JP68.11
A6/20  (via drill 0.51)
  Top 0.254: JP1.20 13.21,29.72 JP7.11 | SJ3.1 12.26,56.07 11.94,55.75 v11.94,53.21
  Bottom 0.254: v11.94,53.21 11.94,36.07 10.67,34.8 JP7.11
A7
  Bottom 0.254: JP37.A10 17.02,110.24 11.94,110.24 10.67,111.51 JP41.7
A7/1  (via drill 0.51)
  Top 0.254: JP10.21 46.74,27.18 JP14.10 | SJ2.1 45.47,61.15 44.83,60.52 v44.83,59.88
  Bottom 0.254: v44.83,59.88 44.83,58.29 46.74,56.39 46.74,34.8 44.2,32.26 JP14.10
A7/2  (via drill 0.51)
  Top 0.254: JP19.21 80.26,27.18 JP23.10 | SJ9.1 78.99,61.15 78.36,60.52 v78.36,59.88
  Bottom 0.254: v78.36,59.88 78.36,58.29 80.26,56.39 80.26,34.8 77.72,32.26 JP23.10
A7/3  (via drill 0.51)
  Top 0.254: JP28.21 113.79,27.18 JP32.10 | SJ13.1 112.52,61.15 111.89,60.52 v111.89,59.88
  Bottom 0.254: v111.89,59.88 111.89,58.29 113.79,56.39 113.79,34.8 111.25,32.26 JP32.10
A7/4  (via drill 0.51)
  Top 0.254: JP37.21 13.21,114.05 JP41.10 | SJ17.1 11.94,148.02 11.3,147.38 v11.3,146.75
  Bottom 0.254: v11.3,146.75 11.3,145.16 13.21,143.26 13.21,121.67 10.67,119.13 JP41.10
A7/5  (via drill 0.51)
  Top 0.254: JP46.21 46.74,114.05 JP50.10 | SJ21.1 45.47,148.02 44.83,147.38 v44.83,146.75
  Bottom 0.254: v44.83,146.75 44.83,145.16 46.74,143.26 46.74,121.67 44.2,119.13 JP50.10
A7/6  (via drill 0.51)
  Top 0.254: JP55.21 80.26,114.05 JP59.10 | SJ25.1 78.99,148.02 78.36,147.38 v78.36,146.75
  Bottom 0.254: v78.36,146.75 78.36,145.16 80.26,143.26 80.26,121.67 77.72,119.13 JP59.10
A7/7  (via drill 0.51)
  Top 0.254: JP64.21 113.79,114.05 JP68.10 | SJ29.1 112.52,148.02 111.89,147.38 v111.89,146.75
  Bottom 0.254: v111.89,146.75 111.89,145.16 113.79,143.26 113.79,121.67 111.25,119.13 JP68.10
A7/21  (via drill 0.51)
  Top 0.254: JP1.21 13.21,27.18 JP7.10 | SJ1.1 11.94,61.15 11.3,60.52 v11.3,59.88
  Bottom 0.254: v11.3,59.88 11.3,58.29 13.21,56.39 13.21,34.8 10.67,32.26 JP7.10
A8
  Bottom 0.254: JP37.A11 19.88,112.46 19.88,108.33 19.24,107.7 11.94,107.7 10.67,108.97 JP41.6
A8/1
  Top 0.254: JP10.22 46.74,24.64 JP14.9
A8/2
  Top 0.254: JP19.22 80.26,24.64 JP23.9
A8/3
  Top 0.254: JP28.22 113.79,24.64 JP32.9
A8/4
  Top 0.254: JP37.22 13.21,111.51 JP41.9
A8/5
  Top 0.254: JP46.22 46.74,111.51 JP50.9
A8/6
  Top 0.254: JP55.22 80.26,111.51 JP59.9
A8/7
  Top 0.254: JP64.22 113.79,111.51 JP68.9
A8/22
  Top 0.254: JP1.22 13.21,24.64 JP7.9
A9
  Bottom 0.254: JP46.A10 50.55,110.24 45.47,110.24 44.2,111.51 JP50.7
A9/1
  Top 0.254: JP10.23 46.74,22.1 JP14.8
A9/2
  Top 0.254: JP19.23 80.26,22.1 JP23.8
A9/3
  Top 0.254: JP28.23 113.79,22.1 JP32.8
A9/4
  Top 0.254: JP37.23 13.21,108.97 JP41.8
A9/5
  Top 0.254: JP46.23 46.74,108.97 JP50.8
A9/6
  Top 0.254: JP55.23 80.26,108.97 JP59.8
A9/7
  Top 0.254: JP64.23 113.79,108.97 JP68.8
A9/23
  Top 0.254: JP1.23 13.21,22.1 JP7.8
A10
  Bottom 0.254: JP1.A10 17.02,23.37 11.94,23.37 10.67,24.64 JP7.7
A11
  Bottom 0.254: JP1.A11 19.88,25.59 19.88,21.46 19.24,20.83 11.94,20.83 10.67,22.1 JP7.6
A12
  Bottom 0.254: JP46.A11 53.4,112.46 53.4,108.33 52.77,107.7 45.47,107.7 44.2,108.97 JP50.6
A13
  Bottom 0.254: JP55.A10 84.07,110.24 78.99,110.24 77.72,111.51 JP59.7
A14
  Bottom 0.254: JP55.A11 86.93,112.46 86.93,108.33 86.3,107.7 78.99,107.7 77.72,108.97 JP59.6
A14/DAC
  Top 0.254: JP5.5 18.29,50.04 JP1.A14/DAC
A14/DAC1
  Top 0.254: JP12.5 51.82,50.04 JP10.A14/DAC
A14/DAC2
  Top 0.254: JP21.5 85.34,50.04 JP19.A14/DAC
A14/DAC3
  Top 0.254: JP30.5 118.87,50.04 JP28.A14/DAC
A14/DAC4
  Top 0.254: JP39.5 18.29,136.91 JP37.A14/DAC
A14/DAC5
  Top 0.254: JP48.5 51.82,136.91 JP46.A14/DAC
A14/DAC6
  Top 0.254: JP57.5 85.34,136.91 JP55.A14/DAC
A14/DAC7
  Top 0.254: JP66.5 118.87,136.91 JP64.A14/DAC
A15
  Bottom 0.254: JP64.A10 117.6,110.24 112.52,110.24 111.25,111.51 JP68.7
A16
  Bottom 0.254: JP64.A11 120.46,112.46 120.46,108.33 119.83,107.7 112.52,107.7 111.25,108.97 JP68.6
AREF
  Top 0.254: JP1.AREF 17.02,20.83 13.21,20.83 11.94,19.56 JP7.5
AREF1
  Top 0.254: JP10.AREF 50.55,20.83 46.74,20.83 45.47,19.56 JP14.5
AREF2
  Top 0.254: JP19.AREF 84.07,20.83 80.26,20.83 78.99,19.56 JP23.5
AREF3
  Top 0.254: JP28.AREF 117.6,20.83 113.79,20.83 112.52,19.56 JP32.5
AREF4
  Top 0.254: JP37.AREF 17.02,107.7 13.21,107.7 11.94,106.43 JP41.5
AREF5
  Top 0.254: JP46.AREF 50.55,107.7 46.74,107.7 45.47,106.43 JP50.5
AREF6
  Top 0.254: JP55.AREF 84.07,107.7 80.26,107.7 78.99,106.43 JP59.5
AREF7
  Top 0.254: JP64.AREF 117.6,107.7 113.79,107.7 112.52,106.43 JP68.5
CTS
  Top 0.254: JP3.2 30.99,66.55 31.18,66.74 JP9.12
CTS1
  Top 0.254: JP16.2 64.52,66.55 64.71,66.74 JP17.12
CTS2
  Top 0.254: JP25.2 98.04,66.55 98.23,66.74 JP26.12
CTS3
  Top 0.254: JP34.2 131.57,66.55 131.76,66.74 JP35.12
CTS4
  Top 0.254: JP43.2 30.99,153.42 31.18,153.61 JP44.12
CTS5
  Top 0.254: JP52.2 64.52,153.42 64.71,153.61 JP53.12
CTS6
  Top 0.254: JP61.2 98.04,153.42 98.23,153.61 JP62.12
CTS7
  Top 0.254: JP70.2 131.57,153.42 131.76,153.61 JP71.12
DIO0
  Top 0.254: JP3.10 32.87,83.72 JP9.20
DIO1
  Top 0.254: JP3.9 30.99,83.06 30.99,82.42 31.62,81.79 33.53,81.79 34.58,80.74 JP9.19
DIO2
  Top 0.254: JP3.8 30.99,80.52 32.26,80.52 32.87,79.91 JP9.18
DIO3
  Top 0.254: 32.29,76.74 32.26,76.71 | 32.29,76.74 32.23,76.74 JP3.7 | JP9.17 32.29,76.74
DIO4
  Top 0.254: JP3.1 30.99,64.01 31.72,64.74 JP9.11
DIO5
  Top 0.254: R2.2 27.18,75.44 28.45,74.17 JP3.5 30.99,74.17 32.42,72.74 JP9.15
DIO6
  Top 0.254: JP16.1 64.52,64.01 65.25,64.74 JP17.11
DIO7
  Top 0.254: JP16.3 65.79,69.09 66.14,68.74 JP17.13
DIO8
  Top 0.254: 65.82,76.74 65.79,76.71 | 65.82,76.74 65.76,76.74 JP16.7 | JP17.17 65.82,76.74
DIO9
  Top 0.254: JP3.3 32.26,69.09 32.61,68.74 JP9.13
DIO10
  Top 0.254: JP16.8 64.52,80.52 65.79,80.52 66.4,79.91 JP17.18
DIO11
  Top 0.254: JP2.4 14.48,71.63 13.59,70.74 JP9.7
DIO12
  Top 0.254: JP2.7 15.75,77.98 14.48,77.98 13.87,77.37 JP9.4
DIO13
  Top 0.254: JP16.9 64.52,83.06 64.52,82.42 65.15,81.79 67.06,81.79 68.11,80.74 JP17.19
DIO14
  Top 0.254: JP16.10 66.4,83.72 JP17.20
DIO15
  Top 0.254: JP15.4 48.01,71.63 47.12,70.74 JP17.7
DIO16
  Top 0.254: JP15.7 49.28,77.98 48.01,77.98 47.4,77.37 JP17.4
DIO17
  Top 0.254: R7.2 60.71,75.44 61.98,74.17 JP16.5 64.52,74.17 65.95,72.74 JP17.15
DIO18
  Top 0.254: JP25.1 98.04,64.01 98.77,64.74 JP26.11
DIO19
  Top 0.254: JP25.3 99.31,69.09 99.66,68.74 JP26.13
DIO20
  Top 0.254: 99.34,76.74 99.31,76.71 | 99.34,76.74 99.28,76.74 JP25.7 | JP26.17 99.34,76.74
DIO21
  Top 0.254: JP25.8 98.04,80.52 99.31,80.52 99.92,79.91 JP26.18
DIO22
  Top 0.254: JP25.9 98.04,83.06 98.04,82.42 98.68,81.79 100.58,81.79 101.63,80.74 JP26.19
DIO23
  Top 0.254: JP25.10 99.92,83.72 JP26.20
DIO24
  Top 0.254: JP24.4 81.53,71.63 80.64,70.74 JP26.7
DIO25
  Top 0.254: JP24.7 82.8,77.98 81.53,77.98 80.92,77.37 JP26.4
DIO26
  Top 0.254: R13.2 94.23,75.44 95.5,74.17 JP25.5 98.04,74.17 99.47,72.74 JP26.15
DIO27
  Top 0.254: JP34.1 131.57,64.01 132.3,64.74 JP35.11
DIO28
  Top 0.254: JP34.3 132.84,69.09 133.19,68.74 JP35.13
DIO29
  Top 0.254: 132.87,76.74 132.84,76.71 | 132.87,76.74 132.81,76.74 JP34.7 | JP35.17 132.87,76.74
DIO30
  Top 0.254: JP34.8 131.57,80.52 132.84,80.52 133.45,79.91 JP35.18
DIO31
  Top 0.254: JP34.9 131.57,83.06 131.57,82.42 132.21,81.79 134.11,81.79 135.16,80.74 JP35.19
DIO32
  Top 0.254: JP34.10 133.45,83.72 JP35.20
DIO33
  Top 0.254: JP33.4 115.06,71.63 114.17,70.74 JP35.7
DIO34
  Top 0.254: JP33.7 116.33,77.98 115.06,77.98 114.45,77.37 JP35.4
DIO35
  Top 0.254: R18.2 127.76,75.44 129.03,74.17 JP34.5 131.57,74.17 133,72.74 JP35.15
DIO36
  Top 0.254: JP43.1 30.99,150.88 31.72,151.61 JP44.11
DIO37
  Top 0.254: JP43.3 32.26,155.96 32.61,155.61 JP44.13
DIO38
  Top 0.254: 32.29,163.61 32.26,163.58 | 32.29,163.61 32.23,163.61 JP43.7 | JP44.17 32.29,163.61
DIO39
  Top 0.254: JP43.8 30.99,167.39 32.26,167.39 32.87,166.78 JP44.18
DIO40
  Top 0.254: JP43.9 30.99,169.93 30.99,169.29 31.62,168.66 33.53,168.66 34.58,167.61 JP44.19
DIO41
  Top 0.254: JP43.10 32.87,170.59 JP44.20
DIO42
  Top 0.254: JP42.4 14.48,158.5 13.59,157.61 JP44.7
DIO43
  Top 0.254: JP42.7 15.75,164.85 14.48,164.85 13.87,164.24 JP44.4
DIO44
  Top 0.254: R23.2 27.18,162.31 28.45,161.04 JP43.5 30.99,161.04 32.42,159.61 JP44.15
DIO45
  Top 0.254: JP52.1 64.52,150.88 65.25,151.61 JP53.11
DIO46
  Top 0.254: JP52.3 65.79,155.96 66.14,155.61 JP53.13
DIO47
  Top 0.254: 65.82,163.61 65.79,163.58 | 65.82,163.61 65.76,163.61 JP52.7 | JP53.17 65.82,163.61
DIO48
  Top 0.254: JP52.8 64.52,167.39 65.79,167.39 66.4,166.78 JP53.18
DIO49
  Top 0.254: JP52.9 64.52,169.93 64.52,169.29 65.15,168.66 67.06,168.66 68.11,167.61 JP53.19
DIO50
  Top 0.254: JP52.10 66.4,170.59 JP53.20
DIO51
  Top 0.254: JP51.4 48.01,158.5 47.12,157.61 JP53.7
DIO52
  Top 0.254: JP51.7 49.28,164.85 48.01,164.85 47.4,164.24 JP53.4
DIO53
  Top 0.254: R28.2 60.71,162.31 61.98,161.04 JP52.5 64.52,161.04 65.95,159.61 JP53.15
DIO54
  Top 0.254: JP61.1 98.04,150.88 98.77,151.61 JP62.11
DIO55
  Top 0.254: JP61.3 99.31,155.96 99.66,155.61 JP62.13
DIO56
  Top 0.254: 99.34,163.61 99.31,163.58 | 99.34,163.61 99.28,163.61 JP61.7 | JP62.17 99.34,163.61
DIO57
  Top 0.254: JP61.8 98.04,167.39 99.31,167.39 99.92,166.78 JP62.18
DIO58
  Top 0.254: JP61.9 98.04,169.93 98.04,169.29 98.68,168.66 100.58,168.66 101.63,167.61 JP62.19
DIO59
  Top 0.254: JP61.10 99.92,170.59 JP62.20
DIO60
  Top 0.254: JP60.4 81.53,158.5 80.64,157.61 JP62.7
DIO61
  Top 0.254: JP60.7 82.8,164.85 81.53,164.85 80.92,164.24 JP62.4
DIO62
  Top 0.254: R33.2 94.23,162.31 95.5,161.04 JP61.5 98.04,161.04 99.47,159.61 JP62.15
DIO63
  Top 0.254: JP70.1 131.57,150.88 132.3,151.61 JP71.11
DIO64
  Top 0.254: JP70.3 132.84,155.96 133.19,155.61 JP71.13
DIO65
  Top 0.254: 132.87,163.61 132.84,163.58 | 132.87,163.61 132.81,163.61 JP70.7 | JP71.17 132.87,163.61
DIO66
  Top 0.254: JP70.8 131.57,167.39 132.84,167.39 133.45,166.78 JP71.18
DIO67